# Altium PCB CYUSB.PcbDoc (part 1 of 2)
Units mm, origin at the board's own origin, x right, y up, seen from the top; angles counter-clockwise.
Board outline 36.49 x 50.37 mm, 4 copper layers (Top Layer, Internal Plane 1, Signal Layer 1, Bottom Layer), stack 0.778 mm thick; 127 components, 177 nets, 911 pads, 528 vias.
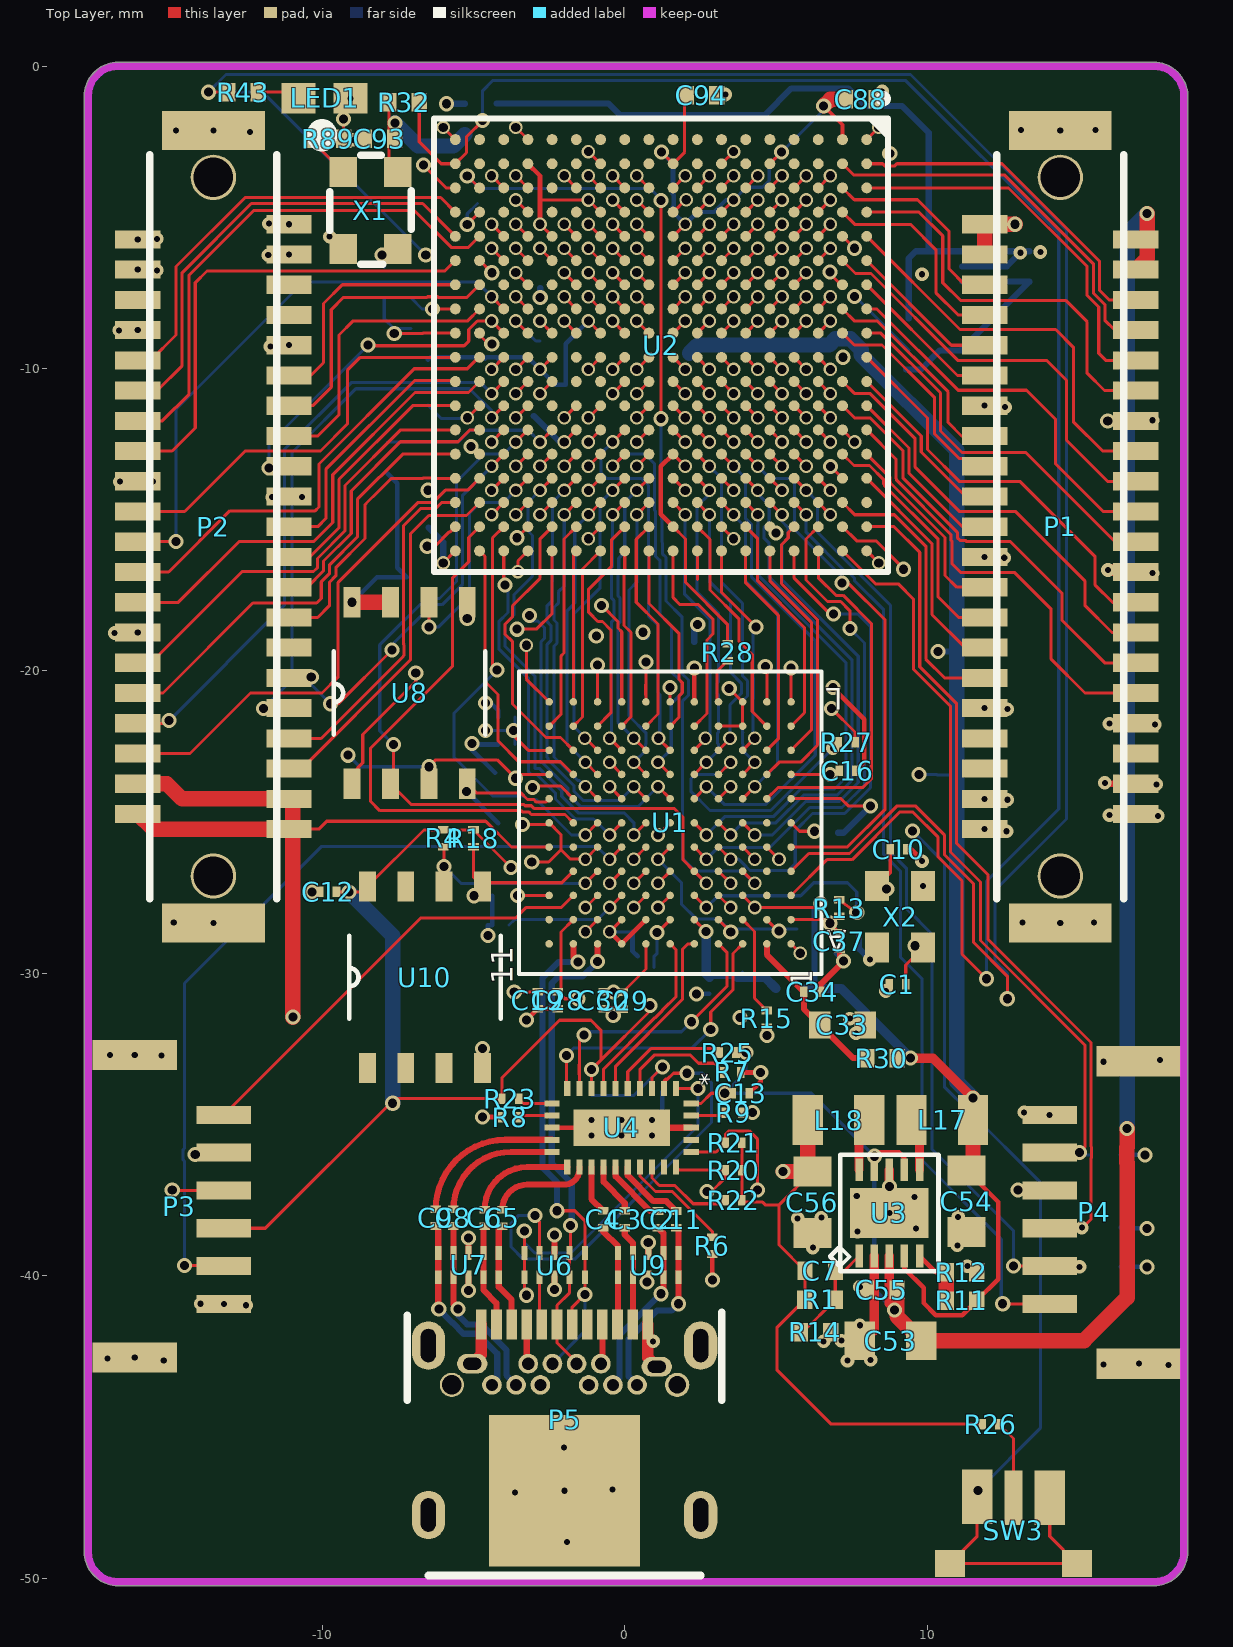
[diagram p0: Top Layer view]
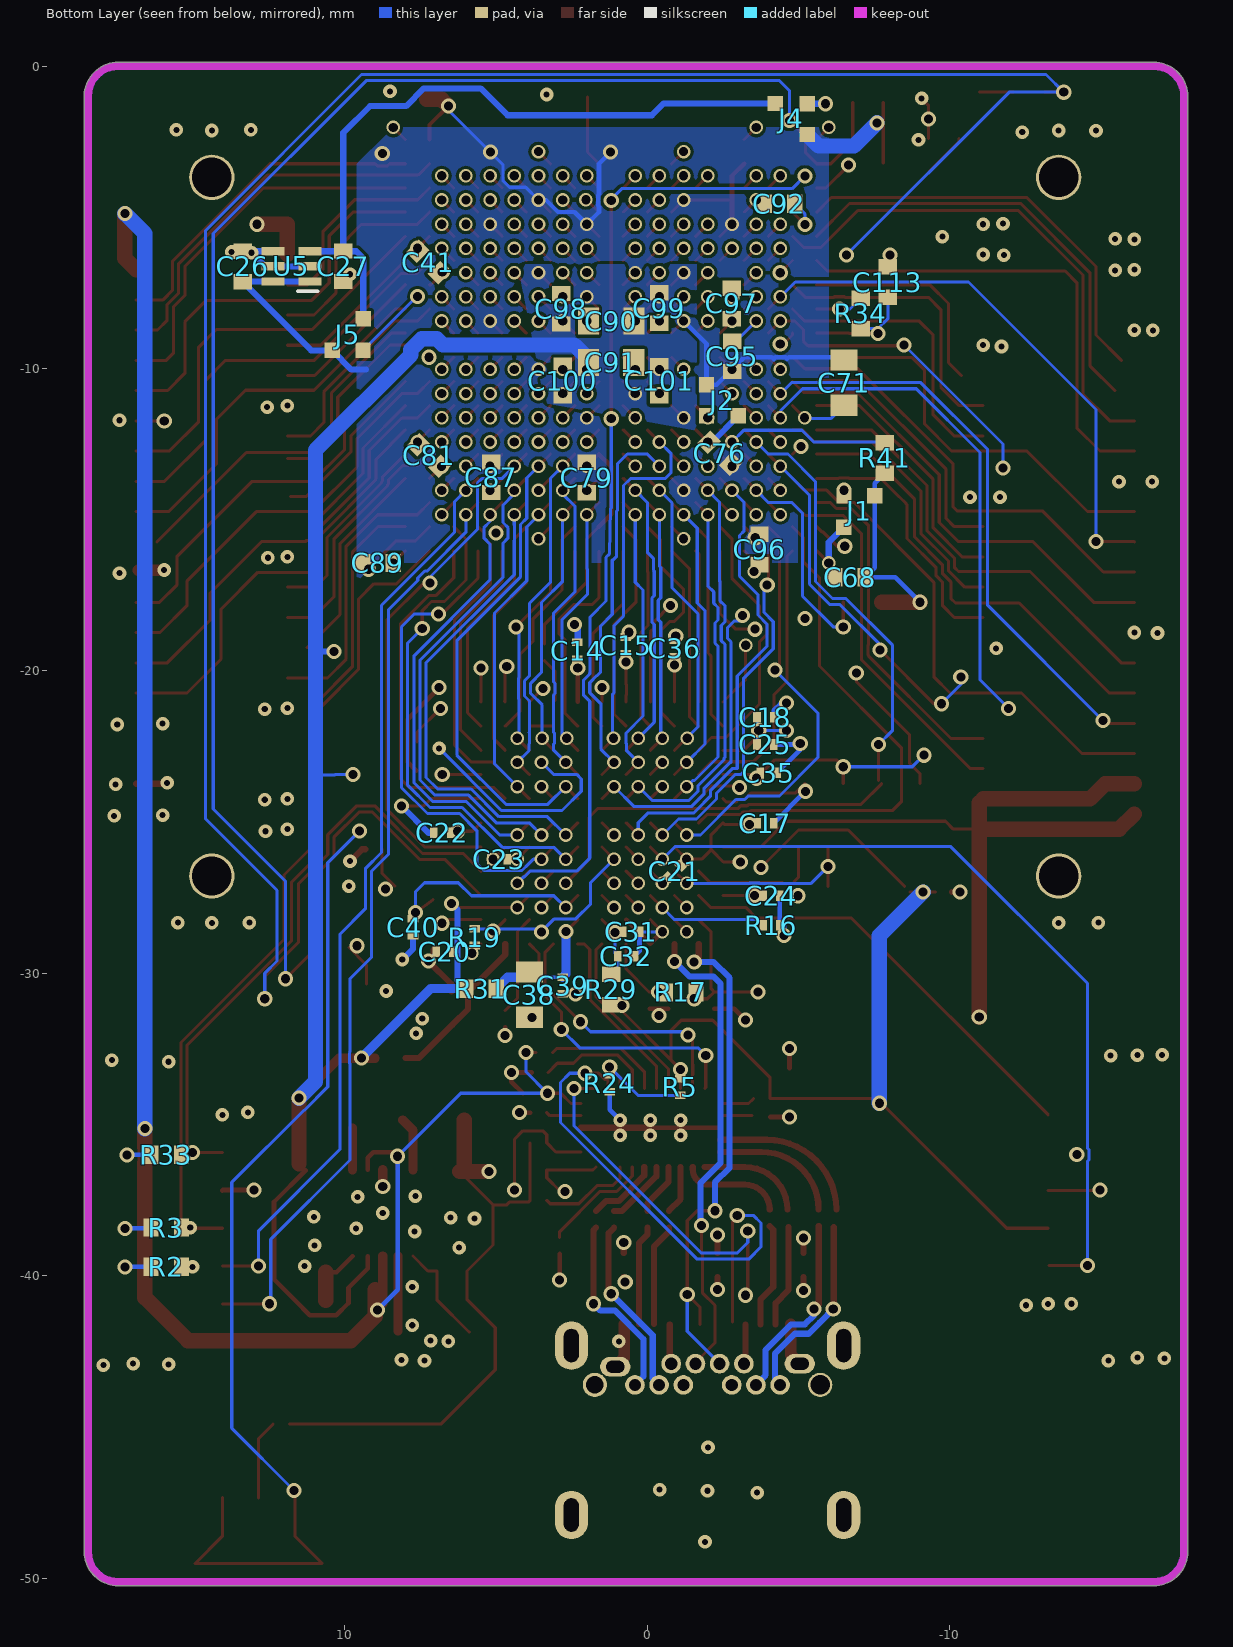
[diagram p1: Bottom Layer view, seen from below]
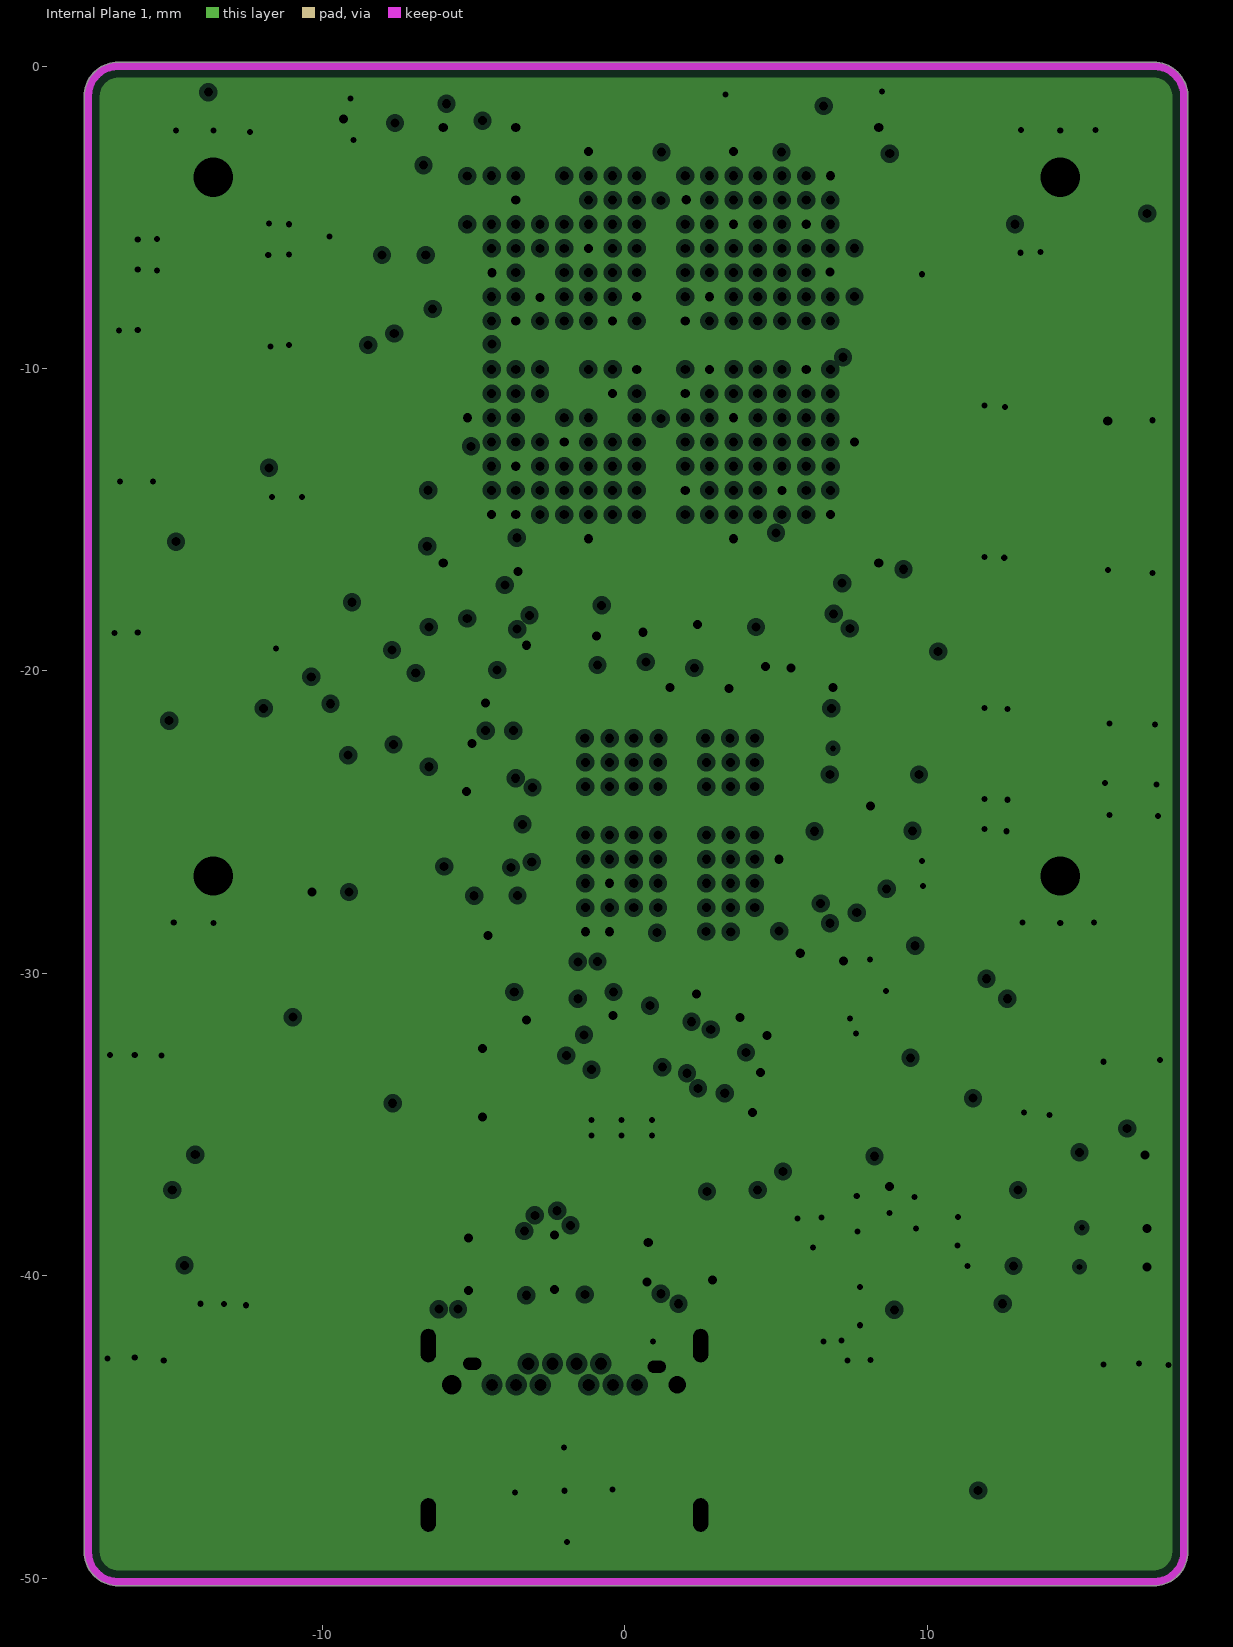
[diagram p2: Internal Plane 1, clearances drawn from the general rule]
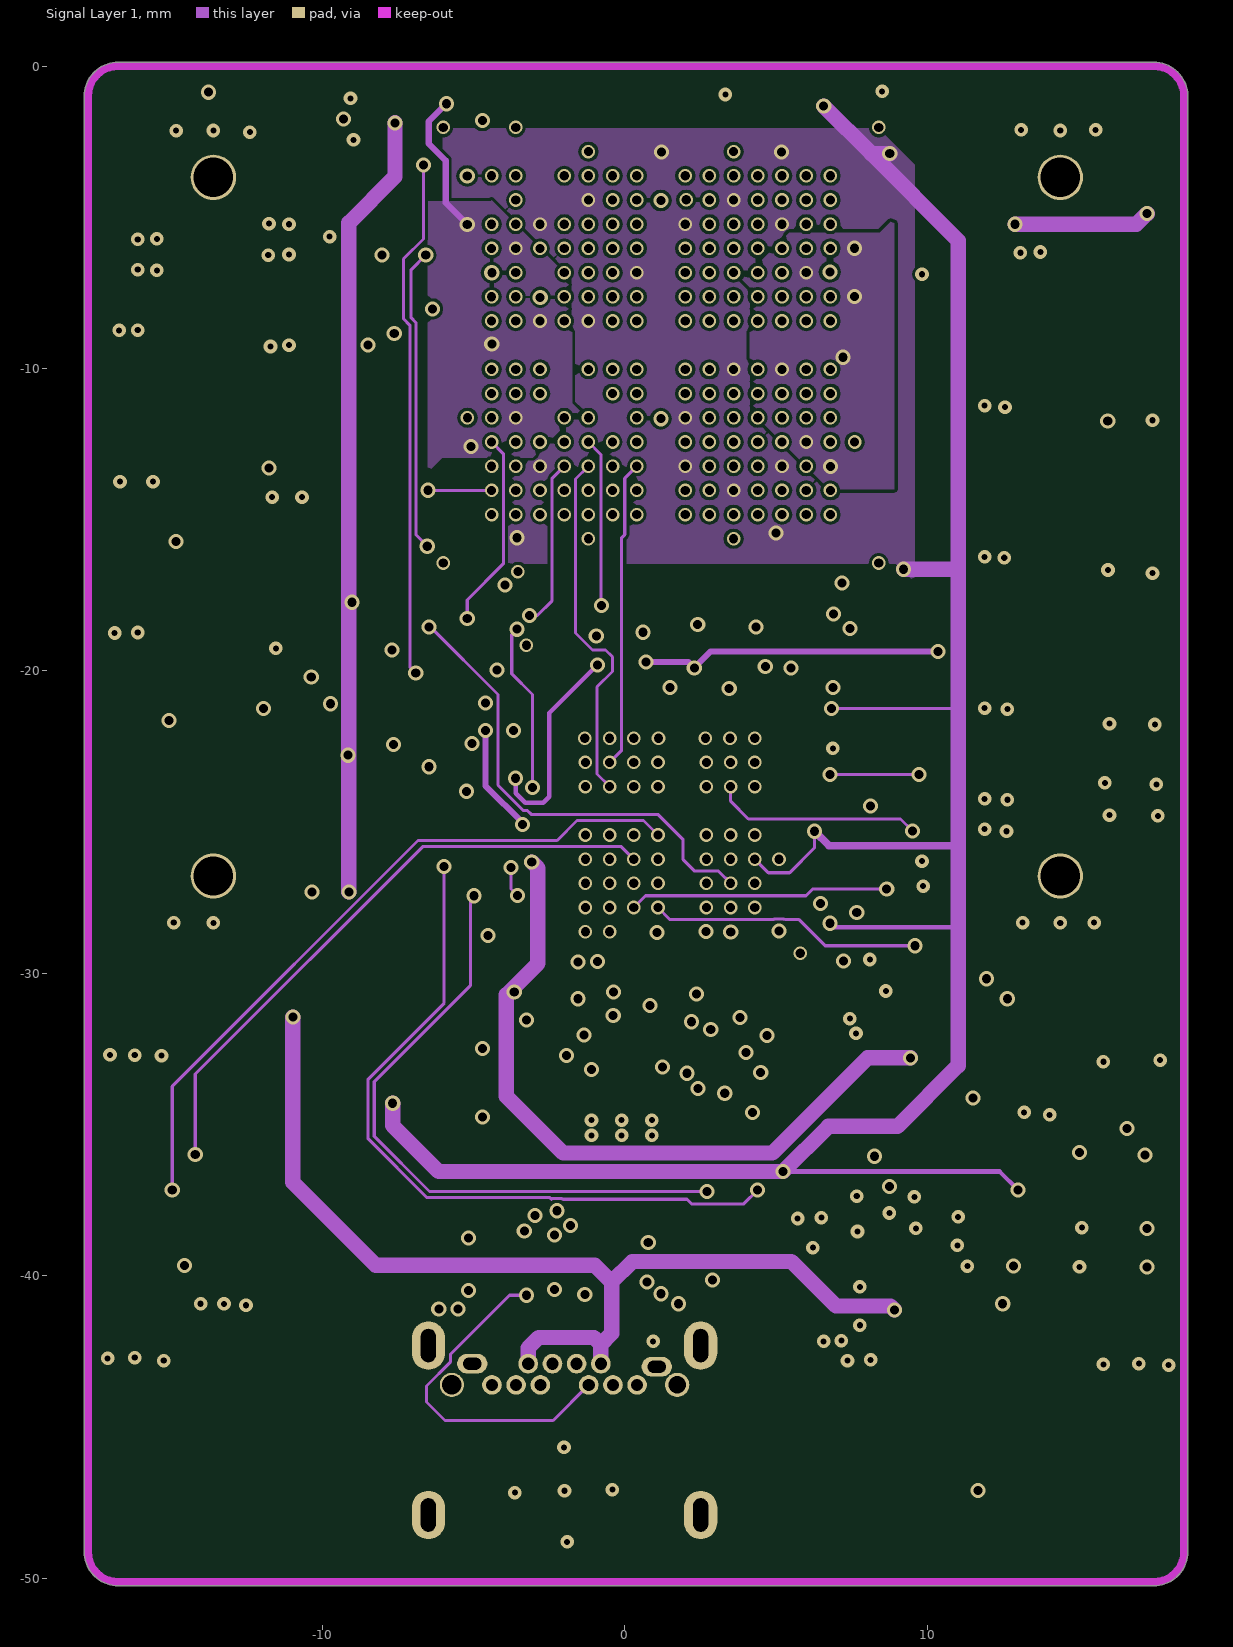
[diagram p3: Signal Layer 1]

## Layer stack, top to bottom
Top Solder: solder mask 0.0102, Solder Resist, Dk 3.8
Top Layer: signal copper 0.0356
Dielectric 1: core 0.254, Dk 4.2
Internal Plane 1: plane copper 0.036, net GND
Dielectric 3: core 0.254, Dk 4.2
Signal Layer 1: signal copper 0.036
Dielectric 4: prepreg 0.127, Dk 4.2
Bottom Layer: signal copper 0.0356
Bottom Solder: solder mask 0.0102, Solder Resist, Dk 3.8

## Board outline
-17.87,-49.117 ccw(c-16.743,-49.117) -16.743,-50.245 ccw(c-16.743,-50.117) -16.742,-50.245 17.491,-50.245 ccw(c17.491,-49.117) 18.618,-49.117 ccw(c18.491,-49.117) 18.618,-49.116 18.618,-0.917 ccw(c18.491,-0.917) 18.611,-0.876 ccw(c17.491,-1) 17.491,0.127 ccw(c17.491,0) 17.489,0.127 -16.743,0.127 ccw(c-16.743,-1) -17.87,-1 ccw(c-17.743,-1) -17.87,-1.001

## Design rules (kind name [scope] priority, off if disabled: settings)
Clearance 50R [InNetClass('50R') vs InPolygon] p1: gap=0.381 ignorepadtopadclearanceinfootprint=FALSE
Clearance [All] p2: gap=0.102 ignorepadtopadclearanceinfootprint=FALSE
DiffPairsRouting [All] p1: maxlimit=0.254 minlimit=0.254 mostfreqgap=0.254 toplayer_minwidth=0.152 toplayer_maxwidth=0.381 toplayer_prefwidth=0.381 midlayer1_minwidth=0.152 midlayer1_maxwidth=0.381 midlayer1_prefwidth=0.381 bottomlayer_minwidth=0.152 bottomlayer_maxwidth=0.381 bottomlayer_prefwidth=0.381 maxuncoupledlength=12.7
MinimumSolderMaskSliver [All] p1 off: minsoldermaskwidth=0.254
NetAntennae NetAntennae_1 [InAnyNet] p1: netantennaetolerance=0
NetAntennae [not InAnyNet] p2: netantennaetolerance=5.08
PlaneClearance [All] p1: clearance=0.152
PlaneConnect [All] p1: planeconnectstyle=Direct reliefexpansion=0.508 reliefentries=4 reliefconductorwidth=0.254 reliefairgap=0.254
PolygonConnect [All] p1: connectstyle=Direct reliefconductorwidth=0.254 reliefentries=4 polygonreliefangle="90 Angle" airgapwidth=0.254
RoomDefinition USB_TYPE_C [InComponentClass('USB_TYPE_C')] p1 off: confinementstyle=ConfineIn formatcopy=TRUE lockcomponents=FALSE outline -107.652,-127.904 -56.852,-127.904 -56.852,-102.504 -107.652,-102.504
RoomDefinition FPGA_IO_Interface [InComponentClass('FPGA_IO_Interface')] p2 off: confinementstyle=ConfineIn formatcopy=TRUE lockcomponents=FALSE outline 19.447,-9.604 41.047,-9.604 41.047,-1.504 19.447,-1.504
RoomDefinition FPGA_Configuration_power [InComponentClass('FPGA_Configuration_power')] p3 off: confinementstyle=ConfineIn formatcopy=TRUE lockcomponents=FALSE outline 19.447,-46.304 171.147,-46.304 171.147,-32.104 19.447,-32.104
RoomDefinition CYUSB_IO [InComponentClass('CYUSB_IO')] p4 off: confinementstyle=ConfineIn formatcopy=TRUE lockcomponents=FALSE outline 19.525,-40.553 35.324,-40.553 35.324,-36.007 19.525,-36.007
RoomDefinition connector [InComponentClass('connector')] p5 off: confinementstyle=ConfineIn formatcopy=TRUE lockcomponents=FALSE outline 19.5,-46.395 64.331,-46.395 64.331,-15.865 19.5,-15.865
RoomDefinition CYUSB [InComponentClass('CYUSB')] p6 off: confinementstyle=ConfineIn formatcopy=TRUE lockcomponents=FALSE outline 19.5,-46.37 25.596,-46.37 25.596,-39.791 19.5,-39.791
RoomDefinition power [InComponentClass('power')] p7 off: confinementstyle=ConfineIn formatcopy=TRUE lockcomponents=FALSE outline 8.553,-18.684 60.75,-18.684 60.75,-11.699 8.553,-11.699
RoutingVias [All] p1: holewidth=0.2 width=0.45 viastyle="Through Hole" minholewidth=0.2 minwidth=0.45 maxholewidth=0.711 maxwidth=1.27
ShortCircuit NoNet [not InAnyNet vs not InAnyNet] p1: allowed=TRUE
ShortCircuit [All] p2: allowed=FALSE
SilkToBoardRegionClearance [All] p1 off:
SilkToSilkClearance [All] p1 off: silktosilkclearance=0.254
SilkToSolderMaskClearance [IsPad] p1 off: minsilkscreentomaskgap=0.254 clearancetoexposedcopper=TRUE
SolderMaskExpansion [All] p1: expansion=0.102
Width [All] p1: maxlimit=1.524 minlimit=0.102 preferedwidth=0.102
21 further rules are at their usual default settings.

## Classes and differential pairs
net class Power: 1.2 1.8 3.3D
component class power: C7 C26 C27 C53 C54 C55 C56 L17 L18 R1 R11 R12 R14 U3 U5
component class CYUSB: C1 C10 C12 C14 C15 C16 C17 C18 C19 C20 C21 C22 C23 C24 C25 C28 C29 C30 C31 C32 C33 C34 C35 C36 C37 C38 C39 C40 P3 R4 R13 R17 R18 R19 R29 R30 R31 U10 X2
component class USB_TYPE_C: C2 C3 C4 C5 C6 C8 C9 C11 P5 R5 R6 R7 R8 R9 R20 R21 R22 R23 R24 R25 U4 U6 U7 U9
component class CYUSB_IO: C13 R15 R16 R26 R27 R28 SW3 U1
component class FPGA_Configuration_power: C41 C71 C76 C79 C81 C87 C88 C89 C90 C91 C92 C94 C95 C96 C97 C98 C99 C100 C101 J4 J5 LED1 P4 R2 R3 R32 R33 R41 R43 R?
component class FPGA_IO_Interface: C68 C93 C113 J1 J2 R34 R89 U2 U8 X1
net class DQ[0..31]: DQ0 DQ1 DQ2 DQ3 DQ4 DQ5 DQ6 DQ7 DQ8 DQ9 DQ10 DQ11 DQ12 DQ13 DQ14 DQ15 DQ16 DQ17 DQ18 DQ19 DQ20 DQ21 DQ22 DQ23 DQ24 DQ25 DQ26 DQ27 DQ28 DQ29 DQ30 DQ31
net class CTL[0..12]: CTL0 CTL1 CTL2 CTL3 CTL4 CTL5 CTL6 CTL7 CTL8 CTL9 CTL10 CTL11 CTL12
net class CYUSB: CTL0 CTL1 CTL2 CTL3 CTL4 CTL5 CTL6 CTL7 CTL8 CTL9 CTL10 CTL11 CTL12 DQ0 DQ1 DQ2 DQ3 DQ4 DQ5 DQ6 DQ7 DQ8 DQ9 DQ10 DQ11 DQ12 DQ13 DQ14 DQ15 DQ16 DQ17 DQ18 DQ19 DQ20 DQ21 DQ22 DQ23 DQ24 DQ25 DQ26 DQ27 DQ28 DQ29 DQ30 DQ31 INT_CYUSB PCLK
net class IA[0..23]: IA0 IA1 IA2 IA3 IA4 IA5 IA6 IA7 IA8 IA9 IA10 IA11 IA12 IA13 IA14 IA15 IA16 IA17 IA18 IA19 IA20 IA21 IA22 IA23
net class IB[0..23]: IB0 IB1 IB2 IB3 IB4 IB5 IB6 IB7 IB8 IB9 IB10 IB11 IB12 IB13 IB14 IB15 IB16 IB17 IB18 IB19 IB20 IB21 IB22 IB23
component class connector: P1 P2

## Components (designator, comment, footprint, x,y, rotation, side; value= is the part's Value field where it differs from the comment)
C1 "100nF" 0201 9.017,-30.353 r0 top
C2 "100nF" 0201 1.1,-38.129 r90 top
C3 "100nF" 0201 0,-38.125 r90 top
C4 "100nF" 0201 -0.711,-38.125 r90 top
C5 "100nF" 0201 -4.049,-38.085 r90 top
C6 "100nF" 0201 -4.633,-38.085 r90 top
C7 "33pF" 0402 6.471,-39.836 r180 top
C8 "100nF" 0201 -5.664,-38.075 r90 top
C9 "100nF" 0201 -6.248,-38.075 r90 top
C10 "100nF" 0201 9.053,-25.893 r0 top
C11 "100nF" 0201 1.7,-38.129 r90 top
C12 "100nF" 0201 -9.804,-27.305 r0 top
C13 "100nF" 0201 3.835,-33.96 r180 top
C14 "100nF" 0201 2.311,-19.329 r270 bottom
C15 "100nF" 0201 0.711,-19.152 r270 bottom
C16 "100nF" 0201 7.366,-23.292 r180 top
C17 "100nF" 0201 -3.9,-25.029 r0 bottom
C18 "100nF" 0201 -3.9,-21.529 r0 bottom
C19 "100nF" 0201 -2.87,-30.886 r90 top
C20 "100nF" 0201 6.706,-29.286 r180 bottom
C21 "100nF" 0201 -0.9,-26.629 r135 bottom
C22 "100nF" 0201 6.782,-25.349 r180 bottom
C23 "100nF" 0201 4.9,-26.229 r180 bottom
C24 "100nF" 0201 -4.1,-27.429 r0 bottom
C25 "10nF" 0201 -3.9,-22.429 r0 bottom
C26 "2.2uF" 0402 13.38,-6.622 r270 bottom
C27 "2.2uF" 0402 10.052,-6.622 r90 bottom
C28 "10nF" 0201 -2.21,-30.886 r90 top
C29 "2.2uF" 0201 -0.07,-30.9 r90 top
C30 "100nF" 0201 -0.686,-30.886 r90 top
C31 "10nF" 0201 0.533,-28.626 r0 bottom
C32 "100nF" 0201 0.7,-29.429 r0 bottom
C33 "22uF" 0603L 7.2,-31.7 r180 top
C34 "100nF" 0201 6.2,-30.6 r180 top
C35 "100nF" 0201 -4.013,-23.368 r0 bottom
C36 "100nF" 0201 -0.914,-19.253 r270 bottom
C37 "100nF" 0201 7.1,-28.929 r90 top
C38 "22uF" 0603L 3.9,-30.7 r90 bottom
C39 "100nF" 0201 2.8,-30.4 r90 bottom
C40 "100nF" 0201 7.747,-28.473 r90 bottom
C41 "0.1uF" 0402 7.239,-6.477 r225 bottom
C53 "10UF" 0805 8.788,-42.139 r0 top
C54 "4.7UF" 0805 11.3,-37.529 r90 top
C55 "33pF" 0402 8.493,-40.458 r0 top
C56 "4.7UF" 0805 6.207,-37.563 r90 top
C68 "0.1uF" 0402 -6.7,-16.9 r180 bottom
C71 "10uF" 0603L -6.502,-10.465 r270 bottom
C76 "0.1uF" 0402 -2.4,-12.8 r45 bottom
C79 "0.1uF" 0402 2,-13.6 r270 bottom
C81 "0.1uF" 0402 7.214,-12.878 r45 bottom
C87 "0.1uF" 0402 5.156,-13.589 r270 bottom
C88 "0.1uF" 0402 7.8,-1.1 r0 top
C89 "0.1uF" 0402 8.911,-16.429 r180 bottom
C90 "10uF" 0603L 1.194,-8.433 r0 bottom
C91 "10uF" 0603L 1.2,-9.8 r180 bottom
C92 "0.1uF" 0402 -4.369,-4.547 r0 bottom
C93 "0.1uF" 0402 -8.1,-2.4 r180 top
C94 "0.1uF" 0402 2.54,-0.965 r0 top
C95 "0.1uF" 0402 -2.8,-9.6 r90 bottom
C96 "0.1uF" 0402 -3.708,-15.977 r270 bottom
C97 "0.1uF" 0402 -2.794,-7.849 r90 bottom
C98 "0.1uF" 0402 2.845,-8.026 r90 bottom
C99 "0.1uF" 0402 -0.4,-8 r270 bottom
C100 "0.1uF" 0402 2.8,-10.4 r90 bottom
C101 "0.1uF" 0402 -0.4,-10.4 r270 bottom
C113 "0R/0.1uF" 0402 -7.95,-7.137 r270 bottom
J1 "jumper" 0402J -6.5,-14.2 r180 bottom
J2 "jumper" 0402J -1.956,-11.557 r90 bottom
J4 "jumper" 0402J -5.283,-1.245 r270 bottom
J5 "jumper" 0402J 9.4,-9.4 r0 bottom
L17 "2.2UH" 0806 10.5,-34.845 r0 top
L18 "2.2uH" 0806 7.071,-34.845 r180 top
LED1 "LED0" 0603 -9.931,-1.067 r0 top
P1 "DF9-41S" DF9-41S 14.4,-15.229 r270 top
P2 "DF9-41S" DF9-41S -13.6,-15.229 r90 top
P3 "JTAG-6P" GH1.25-6 -14.7,-37.8 r270 top
P4 "JTAG-6P" GH1.25-6 15.5,-37.8 r90 top
P5 "TYPEC" TYPEC -1.99,-43.603 r0 top
R1 "300k" 0402 6.461,-40.789 r180 top
R2 "10k" 0402 15.9,-39.7 r0 bottom
R3 "10k" 0402 15.9,-38.4 r0 bottom
R4 "4.7k" 0201 -6,-25.529 r90 top
R5 "NC" 0201 -1.092,-33.757 r90 bottom
R6 "100k" 0201 2.9,-39 r90 top
R7 "100k" 0201 3.556,-33.274 r180 top
R8 "100k" 0201 -3.785,-34.747 r0 top
R9 "100k" 0201 3.6,-34.6 r180 top
R11 "180k" 0402 11.135,-40.814 r0 top
R12 "180k" 0402 11.135,-39.874 r0 top
R13 "10k" 0201 7.087,-27.838 r270 top
R14 "68k" 0402 6.299,-41.859 r0 top
R15 "200R 1%" 0201 4.7,-31.5 r270 top
R16 "6.04K 1%" 0201 -4.1,-28.4 r180 bottom
R17 "FB" 0402 -1.1,-30.629 r180 bottom
R18 "10k" 0201 -5,-25.529 r90 top
R19 "10k" 0201 5.7,-28.8 r270 bottom
R20 "100k" 0201 3.6,-36.5 r0 top
R21 "100k" 0201 3.6,-35.6 r0 top
R22 "100k" 0201 3.6,-37.5 r0 top
R23 "100k" 0201 -3.785,-34.138 r0 top
R24 "0R" 0201 1.245,-33.63 r90 bottom
R25 "900k" 0201 3.404,-32.614 r0 top
R26 "10k" 0201 12.1,-44.9 r0 top
R27 "10k" 0201 7.341,-22.352 r180 top
R28 "NC" 0201 3.404,-19.38 r270 top
R29 "FB" 0402 1.194,-30.531 r90 bottom
R30 "FB" 0402 8.5,-32.8 r0 top
R31 "FB" 0402 5.5,-30.5 r0 bottom
R32 "10k" 0402 -7.3,-1.2 r0 top
R33 "10k" 0402 15.9,-36 r0 bottom
R34 "470k" 0402 -7.061,-8.179 r90 bottom value=0Ohm
R41 "NC" 0402 -7.849,-12.954 r270 bottom
R43 "10k" 0402 -12.624,-0.864 r0 top
R89 "0R" 0402 -9.8,-2.4 r0 top value=0Ohm
SW3 "SW-PB" SW-SIDE 12.851,-48.708 r0 top
U1 "FX3_121_BUMP" FX3_121_BUMP 1.501,-25.021 r180 top
U2 "XC6SLX45-3CSG324I" CSG324 1.2,-9.229 r270 top
U3 "Tps62410" DFN-10P-3X3 8.747,-37.893 r90 top
U4 "HD3SS3220" HD3SS3220 -0.1,-35.1 r270 top
U5 "TLV700xx-WSON" WSON 11.779,-6.622 r0 bottom
U6 "PUSB3FR4" PUSB3FR4 -2.32,-39.64 r270 top
U7 "PUSB3FR4" PUSB3FR4 -5.165,-39.64 r270 top
U8 "M25P16" SO8 -7.112,-20.726 r90 top
U9 "PUSB3FR4" PUSB3FR4 0.779,-39.64 r270 top
U10 "M24M02" SO8 -6.604,-30.124 r90 top
X1 "OSC_40M" TXC_7Q -8.407,-4.775 r270 top
X2 "24mhz" OSCILLATOR-2.5x2.0 9.104,-28.128 r270 top

## Footprints (in the part's own frame and the unit in brackets; to place one, negate y for a bottom-side part, rotate by r counter-clockwise, add the part's x,y. Pads: shape width x height; smd on the part's side, far side on the other; paste and mask are expansions set on the pad)
0201 [mm]
  rect 0.25x0.35 smd: 1(-0.275,0) 2(0.275,0)
0402 [mil] "0402-RES"
  rect 20x24 smd: 1(-19.68,0) 2(20,0)
0402J [mil] "0402-RES"
  rect 20x20 smd: 1(40,0) 2(0,0) 3(-0.35,-41.34)
0603 [mil] "0603-RES"
  rect 44x40 smd: 1(-33.46,0) 2(34,0)
0603L [mm]
  rect 0.7x0.9 smd: 1(-0.75,0) 2(0.75,0)
  body extent -0.8,-0.4 0.8,0.4, height 0.8
0805 [mm]
  rect 1x1.27 smd: 1(-1.016,0) 2(1.016,0)
  body extent -1.27,-0.76 1.27,0.76, height 0.8
0806 [mm]
  rect 1x1.65 smd: 1(-1.016,0) 2(1.016,0)
  body extent -1,-0.8 1,0.8, height 0.5
CSG324 [mm] "BGA, 324-Leads, Body 15x15mm, Pitch 0.8mm"
  round 0.36 smd: A1(-6.8,6.8) A2(-6,6.8) A3(-5.2,6.8) A4(-4.4,6.8) A5(-3.6,6.8) A6(-2.8,6.8) A7(-2,6.8) A8(-1.2,6.8) A9(-0.4,6.8) A10(0.4,6.8) A11(1.2,6.8) A12(2,6.8) A13(2.8,6.8) A14(3.6,6.8) A15(4.4,6.8) A16(5.2,6.8) A17(6,6.8) A18(6.8,6.8) B1(-6.8,6) B2(-6,6) B3(-5.2,6) B4(-4.4,6) B5(-3.6,6) B6(-2.8,6) B7(-2,6) B8(-1.2,6) B9(-0.4,6) B10(0.4,6) B11(1.2,6) B12(2,6) B13(2.8,6) B14(3.6,6) B15(4.4,6) B16(5.2,6) B17(6,6) B18(6.8,6) C1(-6.8,5.2) C2(-6,5.2) C3(-5.2,5.2) C4(-4.4,5.2) C5(-3.6,5.2) C6(-2.8,5.2) C7(-2,5.2) C8(-1.2,5.2) C9(-0.4,5.2) C10(0.4,5.2) C11(1.2,5.2) C12(2,5.2) C13(2.8,5.2) C14(3.6,5.2) C15(4.4,5.2) C16(5.2,5.2) C17(6,5.2) C18(6.8,5.2) D1(-6.8,4.4) D2(-6,4.4) D3(-5.2,4.4) D4(-4.4,4.4) D5(-3.6,4.4) D6(-2.8,4.4) D7(-2,4.4) D8(-1.2,4.4) D9(-0.4,4.4) D10(0.4,4.4) D11(1.2,4.4) D12(2,4.4) D13(2.8,4.4) D14(3.6,4.4) D15(4.4,4.4) D16(5.2,4.4) D17(6,4.4) D18(6.8,4.4) E1(-6.8,3.6) E2(-6,3.6) E3(-5.2,3.6) E4(-4.4,3.6) E5(-3.6,3.6) E6(-2.8,3.6) E7(-2,3.6) E8(-1.2,3.6) E9(-0.4,3.6) E10(0.4,3.6) E11(1.2,3.6) E12(2,3.6) E13(2.8,3.6) E14(3.6,3.6) E15(4.4,3.6) E16(5.2,3.6) E17(6,3.6) E18(6.8,3.6) F1(-6.8,2.8) F2(-6,2.8) F3(-5.2,2.8) F4(-4.4,2.8) F5(-3.6,2.8) F6(-2.8,2.8) F7(-2,2.8) F8(-1.2,2.8) F9(-0.4,2.8) F10(0.4,2.8) F11(1.2,2.8) F12(2,2.8) F13(2.8,2.8) F14(3.6,2.8) F15(4.4,2.8) F16(5.2,2.8) F17(6,2.8) F18(6.8,2.8) G1(-6.8,2) G2(-6,2) G3(-5.2,2) G4(-4.4,2) G5(-3.6,2) G6(-2.8,2) G7(-2,2) G8(-1.2,2) G9(-0.4,2) G10(0.4,2) G11(1.2,2) G12(2,2) G13(2.8,2) G14(3.6,2) G15(4.4,2) G16(5.2,2) G17(6,2) G18(6.8,2) H1(-6.8,1.2) H2(-6,1.2) H3(-5.2,1.2) H4(-4.4,1.2) H5(-3.6,1.2) H6(-2.8,1.2) H7(-2,1.2) H8(-1.2,1.2) H9(-0.4,1.2) H10(0.4,1.2) H11(1.2,1.2) H12(2,1.2) H13(2.8,1.2) H14(3.6,1.2) H15(4.4,1.2) H16(5.2,1.2) H17(6,1.2) H18(6.8,1.2) J1(-6.8,0.4) J2(-6,0.4) J3(-5.2,0.4) J4(-4.4,0.4) J5(-3.6,0.4) J6(-2.8,0.4) J7(-2,0.4) J8(-1.2,0.4) J9(-0.4,0.4) J10(0.4,0.4) J11(1.2,0.4) J12(2,0.4) J13(2.8,0.4) J14(3.6,0.4) J15(4.4,0.4) J16(5.2,0.4) J17(6,0.4) J18(6.8,0.4) K1(-6.8,-0.4) K2(-6,-0.4) K3(-5.2,-0.4) K4(-4.4,-0.4) K5(-3.6,-0.4) K6(-2.8,-0.4) K7(-2,-0.4) K8(-1.2,-0.4) K9(-0.4,-0.4) K10(0.4,-0.4) K11(1.2,-0.4) K12(2,-0.4) K13(2.8,-0.4) K14(3.6,-0.4) K15(4.4,-0.4) K16(5.2,-0.4) K17(6,-0.4) K18(6.8,-0.4) L1(-6.8,-1.2) L2(-6,-1.2) L3(-5.2,-1.2) L4(-4.4,-1.2) L5(-3.6,-1.2) L6(-2.8,-1.2) L7(-2,-1.2) L8(-1.2,-1.2) L9(-0.4,-1.2) L10(0.4,-1.2) L11(1.2,-1.2) L12(2,-1.2) L13(2.8,-1.2) L14(3.6,-1.2) L15(4.4,-1.2) L16(5.2,-1.2) L17(6,-1.2) L18(6.8,-1.2) M1(-6.8,-2) M2(-6,-2) M3(-5.2,-2) M4(-4.4,-2) M5(-3.6,-2) M6(-2.8,-2) M7(-2,-2) M8(-1.2,-2) M9(-0.4,-2) M10(0.4,-2) M11(1.2,-2) M12(2,-2) M13(2.8,-2) M14(3.6,-2) M15(4.4,-2) M16(5.2,-2) M17(6,-2) M18(6.8,-2) N1(-6.8,-2.8) N2(-6,-2.8) N3(-5.2,-2.8) N4(-4.4,-2.8) N5(-3.6,-2.8) N6(-2.8,-2.8) N7(-2,-2.8) N8(-1.2,-2.8) N9(-0.4,-2.8) N10(0.4,-2.8) N11(1.2,-2.8) N12(2,-2.8) N13(2.8,-2.8) N14(3.6,-2.8) N15(4.4,-2.8) N16(5.2,-2.8) N17(6,-2.8) N18(6.8,-2.8) P1(-6.8,-3.6) P2(-6,-3.6) P3(-5.2,-3.6) P4(-4.4,-3.6) P5(-3.6,-3.6) P6(-2.8,-3.6) P7(-2,-3.6) P8(-1.2,-3.6) P9(-0.4,-3.6) P10(0.4,-3.6) P11(1.2,-3.6) P12(2,-3.6) P13(2.8,-3.6) P14(3.6,-3.6) P15(4.4,-3.6) P16(5.2,-3.6) P17(6,-3.6) P18(6.8,-3.6) R1(-6.8,-4.4) R2(-6,-4.4) R3(-5.2,-4.4) R4(-4.4,-4.4) R5(-3.6,-4.4) R6(-2.8,-4.4) R7(-2,-4.4) R8(-1.2,-4.4) R9(-0.4,-4.4) R10(0.4,-4.4) R11(1.2,-4.4) R12(2,-4.4) R13(2.8,-4.4) R14(3.6,-4.4) R15(4.4,-4.4) R16(5.2,-4.4) R17(6,-4.4) R18(6.8,-4.4) T1(-6.8,-5.2) T2(-6,-5.2) T3(-5.2,-5.2) T4(-4.4,-5.2) T5(-3.6,-5.2) T6(-2.8,-5.2) T7(-2,-5.2) T8(-1.2,-5.2) T9(-0.4,-5.2) T10(0.4,-5.2) T11(1.2,-5.2) T12(2,-5.2) T13(2.8,-5.2) T14(3.6,-5.2) T15(4.4,-5.2) T16(5.2,-5.2) T17(6,-5.2) T18(6.8,-5.2) U1(-6.8,-6) U2(-6,-6) U3(-5.2,-6) U4(-4.4,-6) U5(-3.6,-6) U6(-2.8,-6) U7(-2,-6) U8(-1.2,-6) U9(-0.4,-6) U10(0.4,-6) U11(1.2,-6) U12(2,-6) U13(2.8,-6) U14(3.6,-6) U15(4.4,-6) U16(5.2,-6) U17(6,-6) U18(6.8,-6) V1(-6.8,-6.8) V2(-6,-6.8) V3(-5.2,-6.8) V4(-4.4,-6.8) V5(-3.6,-6.8) V6(-2.8,-6.8) V7(-2,-6.8) V8(-1.2,-6.8) V9(-0.4,-6.8) V10(0.4,-6.8) V11(1.2,-6.8) V12(2,-6.8) V13(2.8,-6.8) V14(3.6,-6.8) V15(4.4,-6.8) V16(5.2,-6.8) V17(6,-6.8) V18(6.8,-6.8)
  silkscreen extent -8.27,-7.5 7.5,7.5, body extent -7.5,-7.5 7.5,7.5, height 1.5
DF9-41S [mm]
  rect 1.3x3.4 smd: 0(-13.1,0) 0(13.1,0)
  round 1.5 hole 1.3: 0(-11.55,0) 0(11.55,0)
  rect 0.6x1.5 smd: 1(-10,-2.5) 2(-9,-2.5) 3(-8,-2.5) 4(-7,-2.5) 5(-6,-2.5) 6(-5,-2.5) 7(-4,-2.5) 8(-3,-2.5) 9(-2,-2.5) 10(-1,-2.5) 11(0,-2.5) 12(1,-2.5) 13(2,-2.5) 14(3,-2.5) 15(4,-2.5) 16(5,-2.5) 17(6,-2.5) 18(7,-2.5) 19(8,-2.5) 20(9,-2.5) 21(10,-2.5) 22(9.5,2.5) 23(8.5,2.5) 24(7.5,2.5) 25(6.5,2.5) 26(5.5,2.5) 27(4.5,2.5) 28(3.5,2.5) 29(2.5,2.5) 30(1.5,2.5) 31(0.5,2.5) 32(-0.5,2.5) 33(-1.5,2.5) 34(-2.5,2.5) 35(-3.5,2.5) 36(-4.5,2.5) 37(-5.5,2.5) 38(-6.5,2.5) 39(-7.5,2.5) 40(-8.5,2.5) 41(-9.5,2.5)
  silkscreen extent -12.3,-2.1 12.3,2.1
DFN-10P-3X3 [mm]
  rect 0.75x0.25 smd mask+0.064: 1(-1.451,0.999) 2(-1.451,0.499) 3(-1.451,-0.001) 4(-1.451,-0.501) 5(-1.451,-1.001) 6(1.4,-1.001) 7(1.4,-0.501) 8(1.4,-0.001) 9(1.4,0.499) 10(1.4,0.999)
  rect 1.64x2.6 smd: 11(-0.025,-0.001)
  silkscreen extent -1.96,-1.63 1.9,1.95
FX3_121_BUMP [mm] "FX3_121_BUMP"
  round 0.25 smd: A1(-3.999,3.999) A2(-3.199,3.999) A3(-2.4,3.999) A4(-1.6,3.999) A5(-0.8,3.999) A6(0,3.999) A7(0.8,3.999) A8(1.6,3.999) A9(2.4,3.999) A10(3.199,3.999) A11(3.999,3.999) B1(-3.999,3.199) B2(-3.199,3.199) B3(-2.4,3.199) B4(-1.6,3.199) B5(-0.8,3.199) B6(0,3.199) B7(0.8,3.199) B8(1.6,3.199) B9(2.4,3.199) B10(3.199,3.199) B11(3.999,3.199) C1(-3.999,2.4) C2(-3.199,2.4) C3(-2.4,2.4) C4(-1.6,2.4) C5(-0.8,2.4) C6(0,2.4) C7(0.8,2.4) C8(1.6,2.4) C9(2.4,2.4) C10(3.199,2.4) C11(3.999,2.4) D1(-3.999,1.6) D2(-3.199,1.6) D3(-2.4,1.6) D4(-1.6,1.6) D5(-0.8,1.6) D6(0,1.6) D7(0.8,1.6) D8(1.6,1.6) D9(2.4,1.6) D10(3.199,1.6) D11(3.999,1.6) E1(-3.999,0.8) E2(-3.199,0.8) E3(-2.4,0.8) E4(-1.6,0.8) E5(-0.8,0.8) E6(0,0.8) E7(0.8,0.8) E8(1.6,0.8) E9(2.4,0.8) E10(3.199,0.8) E11(3.999,0.8) F1(-3.999,0) F2(-3.199,0) F3(-2.4,0) F4(-1.6,0) F5(-0.8,0) F6(0,0) F7(0.8,0) F8(1.6,0) F9(2.4,0) F10(3.199,0) F11(3.999,0) G1(-3.999,-0.8) G2(-3.199,-0.8) G3(-2.4,-0.8) G4(-1.6,-0.8) G5(-0.8,-0.8) G6(0,-0.8) G7(0.8,-0.8) G8(1.6,-0.8) G9(2.4,-0.8) G10(3.199,-0.8) G11(3.999,-0.8) H1(-3.999,-1.6) H2(-3.199,-1.6) H3(-2.4,-1.6) H4(-1.6,-1.6) H5(-0.8,-1.6) H6(0,-1.6) H7(0.8,-1.6) H8(1.6,-1.6) H9(2.4,-1.6) H10(3.199,-1.6) H11(3.999,-1.6) J1(-3.999,-2.4) J2(-3.199,-2.4) J3(-2.4,-2.4) J4(-1.6,-2.4) J5(-0.8,-2.4) J6(0,-2.4) J7(0.8,-2.4) J8(1.6,-2.4) J9(2.4,-2.4) J10(3.199,-2.4) J11(3.999,-2.4) K1(-3.999,-3.199) K2(-3.199,-3.199) K3(-2.4,-3.199) K4(-1.6,-3.199) K5(-0.8,-3.199) K6(0,-3.199) K7(0.8,-3.199) K8(1.6,-3.199) K9(2.4,-3.199) K10(3.199,-3.199) K11(3.999,-3.199) L1(-3.999,-3.999) L2(-3.199,-3.999) L3(-2.4,-3.999) L4(-1.6,-3.999) L5(-0.8,-3.999) L6(0,-3.999) L7(0.8,-3.999) L8(1.6,-3.999) L9(2.4,-3.999) L10(3.199,-3.999) L11(3.999,-3.999)
  silkscreen extent -5,-5 5,5, body extent -4.95,-4.95 4.95,4.95, height 0.8
GH1.25-6 [mm]
  rect 1x2.8 smd: 0(-5.1,-1.5) 0(4.9,-1.5)
  rect 0.6x1.8 smd: 1(-3.125,1.45) 2(-1.875,1.45) 3(-0.625,1.45) 4(0.625,1.45) 5(1.875,1.45) 6(3.125,1.45)
  body extent -5.48,-3.1 5.27,1.75, height 4.25
HD3SS3220 [mm]
  rect 1.2x3.2 smd: 0(0,0)
  rect 0.5x0.2 smd: 1(-1.3,1.8) 2(-1.3,1.4) 3(-1.3,1) 4(-1.3,0.6) 5(-1.3,0.2) 6(-1.3,-0.2) 7(-1.3,-0.6) 8(-1.3,-1) 9(-1.3,-1.4) 10(-1.3,-1.8) 16(1.3,-1.8) 17(1.3,-1.4) 18(1.3,-1) 19(1.3,-0.6) 20(1.3,-0.2) 21(1.3,0.2) 22(1.3,0.6) 23(1.3,1) 24(1.3,1.4) 25(1.3,1.8)
  rect 0.2x0.5 smd: 11(-0.8,-2.3) 12(-0.4,-2.3) 13(0,-2.3) 14(0.4,-2.3) 15(0.8,-2.3) 26(0.8,2.3) 27(0.4,2.3) 28(0,2.3) 29(-0.4,2.3) 30(-0.8,2.3)
  body extent -1.25,-2.25 1.25,2.25, height 0.8
OSCILLATOR-2.5x2.0 [mm] "OSCILLATOR-3.2X2.5"
  rect 1x0.8 smd: 1(-1.016,-0.762) 2(1.016,-0.762) 3(1.016,0.762) 4(-1.016,0.762)
  body extent -1.27,-1.02 1.27,1.02, height 0.9
PUSB3FR4 [mm]
  rect 0.45x0.2 smd: 1(-0.4,1) 1(0.4,1) 2(-0.4,0.5) 2(0.4,0.5) 3(-0.4,0) 4(-0.4,-0.5) 4(0.4,-0.5) 5(-0.4,-1) 5(0.4,-1) 8(0.4,0)
  body extent -0.5,-1.25 0.5,1.25, height 0.5
SO8 [mm]
  rect 1x0.559 smd: 1(-3,1.905) 2(-3,0.635) 3(-3,-0.635) 4(-3,-1.905) 5(3,-1.905) 6(3,-0.635) 7(3,0.635) 8(3,1.905)
  silkscreen extent -1.37,-2.5 1.37,2.5, body extent -3,-2.45 3,2.45, height 1.63
SW-SIDE [mm]
  rect 1x0.9 smd: 1(-2.1,-0.8) 1(2.1,-0.8)
  rect 1x1.8 smd: 1(-1.2,1.4) 1(1.2,1.375)
  rect 0.6x1.8 smd: 2(0,1.375)
  body extent -2.25,-1.83 2.25,1.27, height 3.3
TXC_7Q [mm]
  rect 1x0.9 smd: 1(-1.275,-0.9) 2(1.275,-0.9) 3(1.275,0.9) 4(-1.275,0.9)
  silkscreen extent -2.53,-1.6 1.78,1.35
TYPEC [mm]
  oval 1.1x1.6 hole 0.5 slot 1.1 at 90 deg: 0(-4.5,-4.3) 0(-4.5,1.3) 0(4.5,-4.3) 0(4.5,1.3)
  round 0.8 hole 0.65: 0(-3.725,0)
  rect 5x5 smd: 0(0,-3.5)
  round 0.8 hole 0.58: 0(3.725,0)
  rect 0.35x1 smd: 1(-2.75,2) 2(-2.25,2) 3(-1.75,2) 4(-1.25,2) 5(-0.75,2) 6(-0.25,2) 7(0.25,2) 8(0.75,2) 9(1.25,2) 10(1.75,2) 11(2.25,2) 12(2.75,2)
  oval 1x0.65 hole 0.4 slot 0.6 at 0 deg: B1(3.05,0.6) B12(-3.05,0.7)
  round 0.65 hole 0.4: B2(2.4,0) B3(1.6,0) B4(1.2,0.7) B5(0.8,0) B6(0.4,0.7) B7(-0.4,0.7) B8(-0.8,0) B9(-1.2,0.7) B10(-1.6,0) B11(-2.4,0)
  silkscreen extent -5.2,-6.3 5.2,2.4
WSON [mm]
  rect 0.75x0.28 smd: 1(-0.625,0.5) 2(-0.625,0) 3(-0.625,-0.5) 4(0.6,-0.5) 5(0.6,0) 6(0.6,0.5)
  silkscreen extent -0.88,0.82 -0.22,0.82, body extent -0.75,-0.75 0.75,0.75, height 0.7

## Part data
C1 C2 C3 C4 C5 C6 C7 C8 C9 C10 C11 C12 C13 C14 C15 C16 C17 C18 C19 C20 C21 C22 C23 C24 C25 C28 C29 C30 C31 C32 C33 C34 C35 C36 C37 C38 C39 C40 C53 C54 C55 C56: library part CAP/0402, 1st Part Field=0402
C26 C27 C68 C93 C113: library part CAP0402-CAP, "<b>Capacitor</b> / Standard 0603 ceramic capacitor, and 0.1\" leaded capacitor.", PARTNO=CC0402ZRY5V7BB104
C41 C71 C76 C79 C81 C87 C88 C89 C90 C91 C92 C94 C95 C96 C97 C98 C99 C100 C101: library part Cap, "Capacitor", LatestRevisionDate=17-Jul-2002, LatestRevisionNote="Re-released for DXP Platform.", PackageDescription="Radial Cap, Thru-Hole; 2 Leads; 0.3 in Pin Spacing", PackageReference=RAD-0.3, Published=8-Jun-2000, Publisher="Altium Limited"
J1 J2 J4 J5: library part SW-SPDT, "SPDT Subminiature Toggle Switch, Right Angle Mounting, Vertical Actuation", ComponentLink1Description="Manufacturer Link", ComponentLink1URL=http://www.apem.com, DatasheetVersion=05-Dec-2000, LatestRevisionDate=17-Dec-2003, LatestRevisionNote="Schematic revised, PCB Footprint replaced.", PackageDescription="Switch; 4 Leads", PackageReference=TL36WW15050, Published=24-Mar-1999, Publisher="Altium Limited"
L17 L18: library part L/2.5*2.0
LED1: "Typical INFRARED GaAs LED", LatestRevisionDate=08-Jul-2005, LatestRevisionNote="Mech Layer 1 removed.", PackageDescription="LED; 2 Leads", PackageReference=LED-0, Published=8-Jun-2000, Publisher="Altium Limited"
R1 R11 R12 R14: library part RES/0402_3
R2 R3 R4 R5 R6 R7 R8 R9 R13 R15 R16 R17 R18 R19 R20 R21 R22 R23 R24 R25 R26 R27 R28 R29 R30 R31 R32 R33 R34 R41 R43 R89: library part Res2, "Resistor", LatestRevisionDate=17-Jul-2002, LatestRevisionNote="Re-released for DXP Platform.", PackageDescription="Axial Device, Thru-Hole; 2 Leads; 0.4 in Pin Spacing", PackageReference=AXIAL-0.4, Published=8-Jun-2000, Publisher="Altium Limited"
SW3: "Switch", LatestRevisionDate=17-Jul-2002, LatestRevisionNote="Re-released for DXP Platform.", PackageDescription="Switch; 2 Leads", PackageReference=SPST-2, Published=24-Mar-1999, Publisher="Altium Limited"
U1: library part FX3_121_BUMP_10, "FX3", Manufacturer=Cypress
U2: "Spartan-6 LX 1.2V FPGA, 218 User I/Os, 324-Ball Chip-Scale BGA (0.8mm Pitch), Speed Grade 3, Industrial Grade, Pb-Free", Supplier Part Number 1=XC6SLX45-3CSG324I-ND, Code_JEDEC=MO-275-KKAC-1, ComponentLink1Description="Manufacturer Link", ComponentLink1URL=http://www.xilinx.com, ComponentLink2Description="Spartan-6 Datasheet", ComponentLink2URL=http://www.xilinx.com/support/documentation/data_sheets/ds160.pdf, ComponentLink3Description="Spartan-6 Documents", ComponentLink3URL=http://www.xilinx.com/support/documentation/spartan-6.htm, ComponentLink4Description="Xilinx.com Home", ComponentLink4URL=http://www.xilinx.com, DatasheetVersion="ver1.6, Nov-2010", PackageDescription="324-Ball Chip-Scale BGA (CSG324) Package, 0.8 mm Pitch", PackageReference=CSG324, PackageVersion="ver1.1, Nov-2009", Published=17-Nov-2009, Publisher="Altium Limited", Supplier 1=Digi-Key
X2: library part OSCILLATOR-3.2X2.5, "Crystal Oscillator in 3.2x2.5 SMD"

## Via types
v1: diameter 0.45, hole 0.305, Top Layer to Bottom Layer, 248 vias
v2: diameter 0.5, hole 0.3, Top Layer to Bottom Layer, 169 vias
v3: diameter 0.45, hole 0.2, Top Layer to Bottom Layer, 111 vias

## Nets (pads, with @x,y where several pads share a name; then routed paths per layer and width w, separated by ;. In a path a pad name is that pad's centre, name@x,y a point inside that pad or via, vN(x,y) a via of type N, cw(c..) or ccw(c..) an arc to the next point about the centre after c; other vN are vias at no path point)
1.2: C14.2 C15.2 C16.2 C17.2 C18.2 C19.2 C20.2 C21.2 C25.2 C28.2 C54.2 C90.1 C91.1 C98.1 C99.1 C100.1 C101.1 L17.2 R11.2 R17.2 R30.2 R31.2 U1.B10 U1.C3 U1.E9 U1.F11 U1.H1 U1.J11 U1.L5 U1.L7 U2.G7 U2.H9 U2.H11 U2.J8 U2.J10 U2.K9 U2.K11 U2.L8 U2.L10 U2.M7 U2.M12 U3.4 | length 121.8
  Top Layer w0.102: v2(-3.683,-21.971) -3.683,-22.123 -3.185,-22.622 U1.J11@-2.498,-22.622 ; v2(-3.653,-30.611) C19.2@-2.87,-30.611 C28.2@-2.21,-30.611 ; v2(-3.378,-25.07) -2.547,-25.07 U1.F11@-2.498,-25.021 -2.108,-25.412 -2.108,-25.908 ; v2(-3.073,-26.314) -2.515,-26.314 -2.108,-25.908 ; U1.B10@-1.699,-28.221 -2.108,-28.63 -2.108,-30.51 C28.2@-2.21,-30.611 ; v2(-1.549,-30.836) -1.986,-30.836 C28.2@-2.21,-30.611 ; v1(-1.2,-11.629) U2.M12@-0.8,-11.229 ; v1(-1.2,-6.829) U2.M7@-0.8,-7.229 ; U1.E9@-0.899,-25.821 v1(-1.299,-26.221) -1.795,-26.221 -2.108,-25.908 ; v1(-0.4,-10.029) U2.L10@0,-9.629 ; v1(-0.4,-7.629) U2.L8@0,-8.029 ; v1(0.4,-10.829) U2.K11@0.8,-10.429 ; v1(0.4,-8.429) U2.K9@0.8,-8.829 ; v2(0.7,-19.7) 0.701,-19.701 0.701,-20.447 0.694,-20.454 0.694,-20.791 0.701,-20.797 U1.L7@0.701,-21.022 ; U2.J10@1.6,-9.629 v1(2,-10.029) ; U2.J8@1.6,-8.029 v1(2,-7.629) ; U2.H11@2.4,-10.429 v1(2.8,-10.829) ; U2.H9@2.4,-8.829 v1(2.8,-8.429) ; U2.G7@3.2,-7.229 v1(3.6,-6.829) ; U1.C3@3.9,-27.421 v1(4.3,-27.821) 6.342,-27.821 v2(6.477,-27.686) ; U1.H1@5.5,-23.422 v2(6.782,-23.422) C16.2@7.008,-23.422
  Top Layer w0.152: U1.L5@2.301,-21.022 v2(2.301,-19.901) ; U3.4@9.248,-39.344 9.248,-39.753 9.881,-40.386 9.881,-40.894 10.287,-41.3 11.156,-41.3 R11.2@11.643,-40.814 12.344,-40.112 12.344,-37.557 C54.2@11.3,-36.513
  Top Layer w0.305: R30.2@9.008,-32.8 10.194,-32.8 v2(11.516,-34.122)
  Top Layer w0.508: C54.2@11.516,-36.297 L17.2@11.516,-34.845 v2(11.516,-34.122)
  Signal Layer 1 w0.102: v2(6.782,-23.422) 6.785,-23.419 v2(9.728,-23.419)
  Signal Layer 1 w0.203: v2(-4.597,-21.971) -4.597,-23.805 -3.378,-25.024 v2(-3.378,-25.07) ; v2(0.7,-19.7) 2.1,-19.7 v2(2.301,-19.901) 2.846,-19.355 v2(10.363,-19.355)
  Signal Layer 1 w0.508: v2(-3.073,-26.314) -2.87,-26.518 -2.87,-29.667 -3.912,-30.709 -3.912,-34.061 -2.036,-35.937 4.881,-35.937 8.026,-32.791 v2(9.449,-32.791)
  Bottom Layer w0.102: v2@-4.699,-21.971 v2(-4.597,-21.971) v2(-3.683,-21.971) ; C25.2@-3.625,-22.429 C18.2@-3.625,-21.529 ; v2(9.728,-23.419) 10.312,-23.419 10.338,-23.444 10.973,-23.444
  Bottom Layer w0.203: R31.2@6.008,-30.5 6.274,-30.234 6.274,-27.889 v2(6.477,-27.686) ; v2(10.363,-19.355) 10.922,-19.355
  Bottom Layer w0.305: R31.2@6.008,-30.5 7.157,-30.5 v2(9.449,-32.791)
  Bottom Layer w0.508: C91.1@2.14,-9.491 2.392,-9.238 2.441,-9.238 2.459,-9.22 6.764,-9.22 6.96,-9.023 6.963,-9.021 7.464,-9.021 7.819,-9.376 7.819,-9.546 10.973,-12.7 10.973,-23.444 10.973,-33.579 v2(11.516,-34.122)
1.8: C27.2 J4.3 J5.3 U5.3 | length 23.2
  Bottom Layer w0.203: J4.3@-4.233,-1.236 -0.542,-1.236 -0.152,-1.626 4.623,-1.626 5.512,-0.737 7.391,-0.737 7.976,-1.321 9.169,-1.321 10.052,-2.204 C27.2@10.052,-6.114 C27.2@10.052,-6.122 ; J5.3@9.391,-8.35 9.391,-6.357 9.626,-6.122 C27.2@10.052,-6.122 ; U5.3@11.154,-6.122 C27.2@10.052,-6.122
3.3D: C7.2 C12.2 C22.2 C23.2 C24.2 C26.2 C35.2 C36.2 C37.2 C56.2 C68.2 C71.1 C76.1 C79.1 C87.1 C88.1 C89.1 C93.1 C94.1 C95.1 C96.1 J1.1 J2.1 J4.1 J5.1 L18.2 P3.4 P4.4 R1.2 R4.2 R5.2 R13.2 R18.2 R20.2 R21.2 R22.2 R23.1 R26.1 R27.1 R28.1 R29.1 R32.1 R41.2 U1.B1 U1.C11 U1.E3 U1.F1 U1.H11 U1.L9 U2.B1 U2.B17 U2.E2 U2.E5 U2.E9 U2.E14 U2.E17 U2.G4 U2.G10 U2.G15 U2.J2 U2.J5 U2.J12 U2.J14 U2.J17 U2.K7 U2.M4 U2.M9 U2.M15 U2.P5 U2.P10 U2.P14 U2.R2 U2.R17 U4.8 U5.1 U5.6 U8.3 U8.7 U8.8 U10.8 X1.4 | length 252.7
  Top Layer w0.102: P3.4@-13.25,-38.425 -11.882,-38.425 -7.595,-34.138 R23.1@-4.06,-34.138 -4.06,-33.447 -2.159,-31.547 -1.118,-31.547 -0.787,-31.877 -0.787,-32.868 ; C12.2@-9.529,-27.305 v2(-9.119,-27.305) U10.8@-8.69,-27.305 ; U10.8@-8.509,-27.124 -6.639,-25.254 R4.2@-6,-25.254 R18.2@-5,-25.254 v2(-3.759,-26.495) ; X1.4@-7.8,-3.208 R32.1@-7.8,-1.2 ; U8.3@-6.477,-23.726 v2(-6.477,-23.165) -6.248,-22.936 -4.216,-22.936 v2(-3.607,-23.546) -3.483,-23.422 U1.H11@-2.498,-23.422 ; v2(-3.567,-15.596) U2.R17@-3.2,-15.229 ; v2(-3.545,-27.421) U1.C11@-2.498,-27.421 ; v1(-2.8,-13.229) U2.P14@-2.4,-12.829 ; v1(-2.8,-10.029) U2.P10@-2.4,-9.629 ; v1(-2.8,-5.229) U2.P5@-2.4,-5.629 ; -2.784,-4.429 v1(-1.2,-4.429) U2.M4@-0.8,-4.829 ; v1(-1.2,-14.029) U2.M15@-0.8,-13.629 ; v1(-1.2,-8.429) U2.M9@-0.8,-8.829 ; U4.8@-1.1,-33.8 v2(-1.1,-33.18) -0.787,-32.868 ; v2(-0.9,-19.8) -0.899,-19.801 U1.L9@-0.899,-21.022 ; v1(0.4,-6.829) U2.K7@0.8,-7.229 ; v2(0.838,-31.064) 0.838,-31.242 -0.787,-32.868 ; v2(1.216,-2.845) U2.J2@1.6,-3.229 1.981,-2.848 C94.1@1.981,-1.024 ; U2.J17@1.6,-15.229 2.007,-15.636 2.007,-17.069 3.404,-18.466 R28.1@3.404,-19.105 ; U2.J14@1.6,-12.829 v1(2,-13.229) ; U2.J12@1.6,-11.229 v1(2,-11.629) ; U2.J5@1.6,-5.629 v1(2,-5.229) ; U2.G15@3.2,-13.629 v1(3.6,-14.029) ; U2.G10@3.2,-9.629 v1(3.6,-10.029) ; U2.G4@3.2,-4.829 v1(3.6,-4.429) ; R21.2@3.875,-35.6 R20.2@3.875,-36.5 R22.2@3.875,-37.5 3.938,-37.563 4.561,-37.563 4.647,-37.649 5.105,-37.649 ; U1.E3@3.9,-25.821 v1(4.3,-26.221) ; U2.E14@4.8,-12.829 v1(5.2,-13.229) ; U2.E9@4.8,-8.829 v1(5.2,-8.429) ; U2.E5@4.8,-5.629 v1(5.2,-5.229) ; U2.E2@4.8,-3.229 v2(5.184,-2.845) ; U1.B1@5.5,-28.221 6.667,-28.221 v2(6.787,-28.341) C37.2@7.1,-28.654 ; U1.F1@5.5,-25.021 5.777,-25.298 v2(6.274,-25.298) ; R1.2@5.953,-40.789 5.029,-41.713 5.029,-43.104 6.825,-44.9 R26.1@11.825,-44.9 ; R1.2@5.963,-40.779 C7.2@5.963,-39.836 5.105,-38.979 5.105,-37.649 ; C56.2@6.207,-36.547 5.105,-37.649 ; v2(6.833,-21.234) 7.616,-22.017 R27.1@7.616,-22.352 ; U2.B17@7.2,-15.229 7.668,-15.697 8.305,-15.697 v2@9.246,-16.637 ; v2(9.22,-16.637) v2@9.246,-16.637 ; v2@9.322,-16.713 v2@9.246,-16.637
  Top Layer w0.127: v2(6.579,-1.321) 7.2,-1.942 U2.B1@7.2,-2.429
  Top Layer w0.152: U2.R2@-3.2,-3.229 -2.8,-3.629 v1(-2.8,-5.229) ; U2.J17@1.6,-15.229 1.194,-14.823 1.194,-13.235 U2.J14@1.6,-12.829 ; U2.E17@4.8,-15.229 v2(5.004,-15.433) ; v2(13.005,-37.16) 14.035,-37.16 P4.4@14.05,-37.175
  Top Layer w0.508: v2(-9.017,-17.726) U8.7@-7.747,-17.726 ; v2(5.236,-36.547) C56.2@6.207,-36.547 ; C56.2@6.055,-36.394 L18.2@6.055,-34.845 ; v2(6.579,-1.321) 6.799,-1.1 C88.1@7.3,-1.1
  Signal Layer 1 w0.102: v2(-3.759,-26.495) -3.759,-27.207 v2(-3.545,-27.421) ; v1(4.3,-26.221) 4.749,-26.67 5.451,-26.67 6.274,-25.847 v2(6.274,-25.298) ; v2(6.833,-21.234) 10.973,-21.234
  Signal Layer 1 w0.152: v2(-3.607,-23.546) -3.607,-24.035 -3.284,-24.359 -2.692,-24.359 -2.489,-24.155 -2.489,-21.389 v2(-0.9,-19.8) ; v2(5.236,-36.547) 12.391,-36.547 v2(13.005,-37.16) ; v2(6.787,-28.341) 6.919,-28.473 11.024,-28.473
  Signal Layer 1 w0.254: v2(6.274,-25.298) 6.756,-25.781 11.024,-25.781
  Signal Layer 1 w0.508: v2(-9.119,-27.305) -9.119,-5.182 -7.595,-3.658 v2(-7.595,-1.88) ; v2(-7.671,-34.29) -7.671,-35.027 -6.151,-36.547 v2(5.236,-36.547) 6.731,-35.052 9.017,-35.052 11.024,-33.045 11.024,-28.473 11.024,-25.781 11.024,-5.766 8.153,-2.896 ; v2(6.579,-1.321) 8.153,-2.896 ; v2(8.763,-2.896) 8.153,-2.896 ; v2(9.22,-16.637) 10.897,-16.637
  Bottom Layer w0.102: v2(-9.144,-22.784) -8.763,-23.165 v2(-6.477,-23.165) ; v1(3.6,-4.429) 4.023,-4.006 4.556,-4.006 4.777,-3.785 4.777,-3.252 v2(5.184,-2.845) 6.579,-1.45 v2(6.579,-1.321)
  Bottom Layer w0.127: 2.4,-4.829 2.952,-4.829 3.352,-4.429
  Bottom Layer w0.152: v2(-9.017,-17.726) -8.191,-16.9 C68.2@-7.208,-16.9 -7.518,-16.59 -7.518,-13.792 R41.2@-7.849,-13.462 ; C71.1@-6.502,-9.715 -6.414,-9.626 -4.669,-9.626 -4.618,-9.677 -4.567,-9.626 -4.233,-9.626 -4.176,-9.683 -4.119,-9.626 -3.203,-9.626 v1(-2.8,-10.029) -2.288,-10.541 J2.1@-1.956,-10.541 -1.956,-9.185 v1(-1.2,-8.429) ; v2(1.216,-2.845) 1.597,-3.226 1.597,-4.243 1.622,-4.268 1.622,-4.622 1.597,-4.647 1.597,-4.826 v1(2,-5.229) 2.4,-4.829
  Bottom Layer w0.203: 9.296,-10.033 9.783,-10.033 J5.1@10.416,-9.4 11.11,-9.4 C26.2@13.38,-7.13 13.372,-7.122 U5.6@12.379,-7.122 U5.1@11.154,-7.122
  Bottom Layer w0.508: v2(-9.119,-27.305) -7.671,-28.753 v2(-7.671,-34.29) ; v2(-7.595,-1.88) -6.833,-2.642 -5.664,-2.642 J4.1@-5.283,-2.261
CC1: P5.5 U4.2 U6.4 | length 17.3
  Top Layer w0.102: v2(-2.972,-37.998) -2.972,-38.049 -2.82,-38.201 U6.4@-2.82,-39.24 U6.4@-2.82,-40.04 P5.5@-2.82,-41.523 ; U4.2@1.3,-33.8 1.3,-33.549 1.35,-33.499 1.411,-33.499 1.61,-33.299 v2(2.057,-33.299)
  Bottom Layer w0.102: v2(-2.972,-37.998) -3.505,-37.998 -3.759,-38.252 -3.759,-39.04 -3.353,-39.446 -1.651,-39.446 2.87,-34.925 2.87,-33.604 2.565,-33.299 v2(2.057,-33.299)
CC2: P5.B5 U4.1 U6.5 | length 23.6
  Top Layer w0.102: v2(-3.32,-38.514) U6.5@-3.32,-39.24 U6.5@-3.32,-40.04 -3.32,-40.709 v2(-3.251,-40.64) ; U4.1@1.7,-33.8 v2(2.42,-33.8)
  Signal Layer 1 w0.102: v2(-3.251,-40.64) -3.81,-40.64 -5.766,-42.596 -5.766,-42.85 -6.553,-43.637 -6.553,-44.171 -5.944,-44.78 -2.367,-44.78 P5.B5@-1.19,-43.603
  Bottom Layer w0.102: v2(-3.32,-38.514) -3.32,-38.895 -2.972,-39.243 -1.778,-39.243 2.42,-35.045 v2(2.42,-33.8)
CCLK: U1.D4 U2.R15 U8.6 | length 23.8
  Top Layer w0.102: v2@-6.477,-18.44 U8.6@-6.477,-17.726 ; v1(-3.6,-14.029) U2.R15@-3.2,-13.629 ; U1.D4@3.1,-26.621 v1(3.5,-27.021)
  Signal Layer 1 w0.102: v2(-6.477,-18.542) -6.426,-18.542 -4.191,-20.777 -4.191,-23.774 -3.346,-24.619 -3.214,-24.619 -3.093,-24.74 1.092,-24.74 1.93,-25.578 1.93,-26.238 2.311,-26.619 3.099,-26.619 v1(3.5,-27.021)
  Bottom Layer w0.102: v2(-6.477,-18.542) -6.147,-18.542 -5.131,-17.526 -5.131,-14.783 -4.775,-14.427 -3.998,-14.427 v1(-3.6,-14.029)
CLOCK_REF: C113.2 R34.1 U2.V9 | length 3.8
  Top Layer w0.102: v2(-7.62,-8.839) -6.675,-8.839 -6.665,-8.829 U2.V9@-5.6,-8.829
  Bottom Layer w0.102: C113.2@-7.95,-7.645 -7.95,-8.357 -7.628,-8.679 R34.1@-7.061,-8.679
CTL0: U1.K8 U2.L18 | length 6
  Top Layer w0.102: U1.K8@-0.099,-21.822 0.207,-21.516 0.207,-18.724 -0.021,-18.495 -0.021,-17.058 -0.021,-16.724 0,-16.703 U2.L18@0,-16.029
CTL1: U1.K7 U2.K17 | length 7.2
  Top Layer w0.102: U1.K7@0.701,-21.822 1.1,-21.423 1.1,-20.719 1.098,-20.717 1.098,-20.384 1.1,-20.383 1.1,-19.869 1.102,-19.867 1.102,-19.533 1.1,-19.531 1.1,-19.269 1.098,-19.267 1.098,-18.933 1.1,-18.931 1.1,-18.448 0.381,-17.729 0.381,-15.648 U2.K17@0.8,-15.229
CTL2: U1.J7 U2.K15 | length 9.9
  Top Layer w0.102: v1(0.301,-22.222) U1.J7@0.701,-22.622 ; v1(0.4,-14.029) U2.K15@0.8,-13.629
  Bottom Layer w0.102: v1(0.301,-22.222) -0.229,-21.692 -0.229,-18.461 -0.156,-18.389 -0.156,-17.887 -0.156,-17.783 -0.156,-17.58 -0.229,-17.508 -0.229,-16.696 -0.197,-16.664 -0.197,-16.275 0,-16.078 0,-14.429 v1(0.4,-14.029)
CTL3: U1.H7 U2.K16 | length 9.8
  Top Layer w0.102: v1(0.301,-23.022) U1.H7@0.701,-23.422 ; v1(0.4,-14.829) U2.K16@0.8,-14.429
  Bottom Layer w0.102: v1(0.301,-23.022) 0.686,-22.637 0.686,-22.412 0.707,-22.39 0.707,-22.054 0.142,-21.488 0.142,-17.323 0.4,-17.065 v1(0.4,-14.829)
CTL4: U1.G7 U2.N15 | length 14.1
  Top Layer w0.102: v1(-2,-14.029) U2.N15@-1.6,-13.629 ; v1(0.301,-23.822) U1.G7@0.701,-24.222
  Bottom Layer w0.102: v1(-2,-14.029) -2.388,-14.417 -2.388,-17.043 -2.398,-17.033 -2.398,-17.673 -2.565,-17.841 -2.565,-18.371 -2.442,-18.494 -2.442,-18.996 -2.565,-19.119 -2.565,-22.854 -2.54,-22.879 -2.54,-22.927 -1.676,-23.791 -1.676,-23.978 -1.455,-24.199 -1.372,-24.282 -0.16,-24.282 v1(0.301,-23.822)
CTL5: U1.G6 U2.N14 | length 16.7
  Top Layer w0.102: v1(-2,-13.229) U2.N14@-1.6,-12.829 ; v1(1.101,-23.822) U1.G6@1.501,-24.222
  Signal Layer 1 w0.102: v2(-3.15,-18.161) -2.885,-18.161 -2.398,-17.673 -2.398,-13.627 v1(-2,-13.229)
  Bottom Layer w0.102: v2@-3.15,-18.237 -3.044,-18.343 -2.881,-18.343 -2.646,-18.579 -2.646,-18.912 -2.769,-19.035 -2.769,-23.016 -2.738,-23.016 -1.879,-23.875 -1.879,-24.062 -1.539,-24.402 -1.456,-24.486 0.437,-24.486 v1(1.101,-23.822)
CTL6: U1.K6 U2.K18 | length 6.4
  Top Layer w0.102: U2.K18@0.8,-16.029 0.8,-17.107 0.8,-17.767 1.8,-18.767 1.8,-20.281 1.903,-20.384 1.903,-20.717 1.8,-20.821 1.8,-21.523 U1.K6@1.501,-21.822
CTL7: U1.H8 U2.K14 | length 11.3
  Top Layer w0.102: v1(-0.499,-23.022) U1.H8@-0.099,-23.422 ; v1(0.4,-13.229) U2.K14@0.8,-12.829
  Signal Layer 1 w0.102: v1(-0.499,-23.022) -0.102,-22.625 -0.102,-15.596 0,-15.494 0,-13.629 v1(0.4,-13.229)
CTL8: U1.G5 U2.G14 | length 16.3
  Top Layer w0.102: U1.G5@2.301,-24.222 v1(2.701,-23.822) ; U2.G14@3.2,-12.829 v1(3.6,-13.229)
  Bottom Layer w0.102: v1(2.701,-23.822) 3.288,-24.409 4.674,-24.409 6.299,-22.784 6.299,-18.999 4.197,-16.897 4.197,-15.77 4.195,-15.768 4.195,-15.158 3.988,-14.95 3.988,-13.617 v1(3.6,-13.229)
CTL9: U1.H6 U2.L14 | length 13.4
  Top Layer w0.102: v1(-0.4,-13.229) U2.L14@0,-12.829 ; v1(1.101,-23.022) U1.H6@1.501,-23.422
  Bottom Layer w0.102: v1(-0.4,-13.229) 0.002,-12.827 0.66,-12.827 0.991,-13.157 0.991,-14.692 1.015,-14.717 1.015,-16.209 1.132,-16.325 1.161,-16.325 1.161,-18.128 1.549,-18.517 1.549,-20.041 1.657,-20.148 1.667,-20.148 1.903,-20.384 1.903,-20.717 1.539,-21.082 1.539,-22.584 v1(1.101,-23.022)
CTL10: U1.K5 U2.J18 | length 7
  Top Layer w0.102: U2.J18@1.6,-16.029 1.6,-17.577 1.829,-17.805 2.438,-17.805 2.921,-18.288 2.921,-18.771 2.718,-18.974 2.718,-21.405 U1.K5@2.301,-21.822
CTL11: U1.J5 U2.J16 | length 8.9
  Top Layer w0.102: U2.J16@1.6,-14.429 v1(2,-14.829) ; U1.J5@2.301,-22.622 2.667,-22.255 v1(2.667,-22.225)
  Bottom Layer w0.102: v1(2,-14.829) 2,-16.618 1.981,-16.637 1.981,-17.465 2.815,-18.299 2.815,-22.107 2.697,-22.225 v1(2.667,-22.225)
CTL12: U1.H5 U2.H15 | length 10.8
  Top Layer w0.102: U1.H5@2.301,-23.422 v1(2.701,-23.022) ; U2.H15@2.4,-13.629 v1(2.8,-14.029)
  Bottom Layer w0.102: v1(2.701,-23.022) 3.099,-22.624 3.099,-22.419 3.073,-22.393 3.073,-22.057 3.099,-22.031 3.099,-20.79 3.052,-20.743 3.052,-20.41 3.099,-20.363 3.099,-18.085 2.388,-17.374 2.388,-14.564 2.8,-14.152 v1(2.8,-14.029)
DATA: U1.D5 U2.R13 U8.2 | length 27.1
  Top Layer w0.102: U8.2@-7.747,-23.726 -7.058,-24.416 -3.339,-24.416 -3.3,-24.455 -3.091,-24.455 -3.005,-24.541 1.63,-24.541 1.93,-24.841 1.93,-26.251 U1.D5@2.301,-26.621 v1(2.701,-27.021) ; U8.2@-7.645,-23.625 v2(-7.645,-22.428) ; v1(-3.6,-12.429) U2.R13@-3.2,-12.029
  Bottom Layer w0.102: v2(-7.645,-22.428) -8.099,-21.975 -8.099,-19.137 -6.563,-17.602 -6.121,-17.602 -5.563,-17.043 -5.563,-13.741 -4.648,-12.827 -3.998,-12.827 v1(-3.6,-12.429)
DONE: R43.1 U1.D1 U2.V17 | length 91.2
  Top Layer w0.102: v2(-13.767,-0.864) R43.1@-13.124,-0.864 ; v2(-6.528,-15.875) -6.274,-15.875 -5.799,-15.4 -5.771,-15.4 U2.V17@-5.6,-15.229 ; U1.D1@5.5,-26.621 6.086,-26.035 7.434,-26.035 9.009,-24.46 9.609,-24.46 10.566,-25.417 10.566,-26.068 11.532,-27.034 11.532,-28.972 12.649,-30.09 v2(12.649,-30.836)
  Signal Layer 1 w0.102: v2(-6.579,-6.248) -7.061,-6.731 -7.061,-8.323 -6.902,-8.482 -6.902,-15.5 v2(-6.528,-15.875)
  Bottom Layer w0.102: v2(-6.579,-6.248) -11.963,-0.864 v2(-13.767,-0.864) -13.183,-0.279 9.449,-0.279 14.605,-5.436 14.605,-24.892 12.243,-27.254 12.243,-29.591 12.649,-29.997 v2(12.649,-30.836)
DQ0: U1.F10 U2.U17 | length 17.6
  Top Layer w0.102: U2.U17@-4.8,-15.229 -5.156,-15.585 -5.156,-16.383 -5.69,-16.916 -5.69,-19.837 -8.407,-22.555 -8.407,-24.308 -8.096,-24.619 -7.142,-24.619 -3.423,-24.619 -3.384,-24.658 -3.298,-24.658 -3.175,-24.658 -3.089,-24.744 -1.976,-24.744 U1.F10@-1.699,-25.021
DQ1: U1.F9 U2.T17 | length 14.4
  Top Layer w0.102: v2(-4.216,-19.964) -4.369,-19.812 -4.369,-15.598 U2.T17@-4,-15.229 ; v1(-1.299,-25.421) U1.F9@-0.899,-25.021
  Bottom Layer w0.102: v2(-4.216,-19.964) -5.639,-21.387 -5.639,-22.86 -4.369,-24.13 -3.337,-24.13 -3.216,-24.251 -2.927,-24.251 -1.757,-25.421 v1(-1.299,-25.421)
DQ2: U1.F7 U2.P15 | length 15.9
  Top Layer w0.102: v1(-2.8,-14.029) U2.P15@-2.4,-13.629 ; v1(0.301,-25.421) U1.F7@0.701,-25.021
  Bottom Layer w0.102: v1(-2.8,-14.029) -3.2,-14.429 -3.2,-15.367 -3.048,-15.519 -3.048,-16.866 -3.658,-17.475 -3.658,-18.151 -3.958,-18.452 -3.958,-19.181 -2.972,-20.168 -2.972,-23.22 -2.822,-23.22 -2.082,-23.959 -2.082,-24.146 -1.623,-24.605 -1.54,-24.689 -0.025,-24.689 0.301,-25.015 v1(0.301,-25.421)
DQ3: U1.G10 U2.P18 | length 10.6
  Top Layer w0.102: v2(-3.556,-18.618) -2.921,-18.618 -2.4,-18.097 -2.4,-17.676 -2.398,-17.673 -2.398,-17.34 -2.4,-17.338 U2.P18@-2.4,-16.029 ; v2(-3.049,-23.849) -3,-23.8 -2.12,-23.8 U1.G10@-1.699,-24.222
  Signal Layer 1 w0.102: v2(-3.556,-18.618) -3.734,-18.796 -3.734,-20.091 -3.049,-20.776 v2(-3.049,-23.849) v2@-3.075,-23.849
DQ4: U1.G9 U2.N16 | length 10.8
  Top Layer w0.102: v1(-2,-14.829) U2.N16@-1.6,-14.429 ; v1(-1.299,-23.822) U1.G9@-0.899,-24.222
  Bottom Layer w0.102: v1(-2,-14.829) -2,-17.189 -2.194,-17.384 -2.194,-17.757 -2.337,-17.9 -2.337,-18.313 -2.239,-18.41 -2.239,-19.08 -2.337,-19.178 -2.337,-22.843 -1.557,-23.622 -1.498,-23.622 v1(-1.299,-23.822)
DQ5: U1.F8 U2.T18 | length 12
  Top Layer w0.102: v2@-4,-17.183 v2@-4,-17.12 ; U2.T18@-4,-16.029 v2@-4,-17.12 ; v2(-3.962,-17.157) v2@-4,-17.12 ; v1(-0.499,-25.421) U1.F8@-0.099,-25.021
  Bottom Layer w0.102: v2@-3.861,-17.259 -3.861,-18.067 -4.162,-18.367 -4.162,-19.265 -3.175,-20.252 -3.175,-23.341 -3.093,-23.423 -2.906,-23.423 -2.286,-24.043 -2.286,-24.23 -1.708,-24.809 -1.624,-24.892 -1.028,-24.892 v1(-0.499,-25.421)
DQ6: U1.H10 U2.U18 | length 9.5
  Top Layer w0.102: U2.U18@-4.8,-16.029 -4.619,-16.21 -4.619,-20.349 -4.191,-20.777 -4.191,-22.309 -3.5,-23 -2.12,-23 U1.H10@-1.699,-23.422
DQ7: U1.H9 U2.M16 | length 9.9
  Top Layer w0.102: v1(-1.299,-23.022) U1.H9@-0.899,-23.422 ; v1(-1.2,-14.829) U2.M16@-0.8,-14.429
  Bottom Layer w0.102: v1(-1.299,-23.022) -1.905,-22.415 -1.905,-18.009 -1.651,-17.755 -1.651,-15.28 v1(-1.2,-14.829)
DQ8: U1.J10 U2.P17 | length 9.3
  Top Layer w0.102: U2.P17@-2.4,-15.229 -2.794,-15.623 -2.794,-16.932 -3.708,-17.846 -3.708,-18.216 -3.723,-18.216 -3.958,-18.452 -3.958,-18.785 -3.723,-19.021 -3.708,-19.021 -3.708,-21.092 -2.6,-22.2 -2.12,-22.2 U1.J10@-1.699,-22.622
DQ9: U1.J9 U2.L15 | length 10
  Top Layer w0.102: v1(-1.321,-22.225) -1.296,-22.225 U1.J9@-0.899,-22.622 ; v1(-0.4,-14.029) U2.L15@0,-13.629
  Bottom Layer w0.102: v1(-1.321,-22.225) -1.321,-22.2 -1.676,-21.844 -1.676,-18.11 -0.813,-17.247 -0.813,-14.442 v1(-0.4,-14.029)
DQ10: U1.K11 U2.N17 | length 7
  Top Layer w0.102: U1.K11@-2.498,-21.822 -2.1,-21.424 -2.1,-19.5 -2.007,-19.407 -2.007,-15.636 U2.N17@-1.6,-15.229
DQ11: U1.L10 U2.N18 | length 5
  Top Layer w0.102: U1.L10@-1.699,-21.022 -1.699,-16.128 U2.N18@-1.6,-16.029
DQ12: U1.K10 U2.M18 | length 6.2
  Top Layer w0.102: U1.K10@-1.699,-21.822 -1.397,-21.52 -1.397,-16.626 U2.M18@-0.8,-16.029
DQ13: U1.K9 U2.L17 | length 7.7
  Top Layer w0.102: U1.K9@-0.899,-21.822 -0.457,-21.38 -0.457,-18.644 -0.737,-18.364 -0.889,-18.364 -1.194,-18.059 -1.194,-17.297 -0.432,-16.535 -0.432,-15.661 U2.L17@0,-15.229
DQ14: U1.J8 U2.L16 | length 8.6
  Top Layer w0.102: v1(-0.499,-22.222) U1.J8@-0.099,-22.622 ; v1(-0.4,-14.829) U2.L16@0,-14.429
  Bottom Layer w0.102: v1(-0.499,-22.222) -0.443,-22.166 -0.443,-18.388 -0.36,-18.305 -0.36,-17.971 -0.36,-17.867 -0.36,-17.664 -0.443,-17.581 -0.443,-16.585 -0.4,-16.542 v1(-0.4,-14.829)
DQ15: U1.G8 U2.M14 | length 13
  Top Layer w0.102: v1(-1.2,-13.229) U2.M14@-0.8,-12.829 ; v1(-0.499,-23.822) U1.G8@-0.099,-24.222
  Signal Layer 1 w0.102: v1(-1.2,-13.229) -1.626,-13.655 -1.626,-13.87 -1.623,-13.873 -1.623,-14.185 -1.626,-14.188 -1.626,-14.67 -1.623,-14.673 -1.623,-14.985 -1.626,-14.988 -1.626,-18.745 -1.067,-19.304 -0.635,-19.304 -0.406,-19.533 -0.406,-20.015 -0.914,-20.523 -0.914,-23.406 v1(-0.499,-23.822)
DQ16: U1.K2 U2.H17 | length 7.5
  Top Layer w0.102: U2.H17@2.4,-15.229 2.819,-15.648 2.819,-17.32 3.785,-18.285 3.785,-19.025 4.216,-19.456 4.216,-21.338 U1.K2@4.7,-21.822
DQ17: U1.J4 U2.H16 | length 9.1
  Top Layer w0.102: U2.H16@2.4,-14.429 v1(2.8,-14.829) ; U1.J4@3.1,-22.622 3.48,-22.243 v1(3.48,-22.225)
  Bottom Layer w0.102: v1(2.8,-14.829) 2.8,-17.034 3.5,-17.734 3.5,-20.041 3.691,-20.231 3.691,-20.243 3.857,-20.41 3.857,-20.743 3.48,-21.12 v1(3.48,-22.225)
DQ18: U1.K1 U2.F17 | length 7.6
  Top Layer w0.102: U2.F17@4,-15.229 4.394,-15.623 4.394,-17.018 5.944,-18.567 5.944,-21.378 U1.K1@5.5,-21.822
DQ19: U1.J2 U2.F18 | length 7.2
  Top Layer w0.102: U2.F18@4,-16.029 4,-17.082 5.08,-18.162 5.08,-22.242 U1.J2@4.7,-22.622
DQ20: U1.J3 U2.G18 | length 7.3
  Top Layer w0.102: U2.G18@3.2,-16.029 3.2,-17.399 v2(4.343,-18.542) ; U1.J3@3.9,-22.622 v1(4.3,-22.222)
  Bottom Layer w0.102: v1(4.3,-22.222) 4.246,-22.167 4.246,-20.929 4.263,-20.911 4.263,-20.241 4.246,-20.224 4.246,-18.64 v2(4.343,-18.542)
DQ21: U1.J1 U2.E18 | length 7.4
  Top Layer w0.102: U2.E18@4.8,-16.029 4.8,-17.017 6.172,-18.39 6.172,-21.95 U1.J1@5.5,-22.622
DQ22: U1.H2 U2.D17 | length 10
  Top Layer w0.102: U1.H2@4.7,-23.422 5.109,-23.012 5.817,-23.012 6.375,-22.454 6.375,-18.305 5.182,-17.112 5.182,-15.824 5.406,-15.599 5.406,-15.423 U2.D17@5.6,-15.229
DQ23: U1.H3 U2.H14 | length 11.7
  Top Layer w0.102: U2.H14@2.4,-12.829 v1(2.8,-13.229) ; U1.H3@3.9,-23.422 v1(4.3,-23.022)
  Bottom Layer w0.102: v1(2.8,-13.229) 3.2,-13.629 3.2,-17.069 3.894,-17.762 3.894,-20.159 4.06,-20.325 4.06,-20.827 3.894,-20.993 3.894,-22.054 ; 3.912,-22.036 3.894,-22.054 ; v1(4.3,-23.022) 3.912,-22.633 3.912,-22.408 3.894,-22.39 3.894,-22.054
DQ24: U1.F4 U2.F15 | length 16.9
  Top Layer w0.102: U1.F4@3.1,-25.021 v1(3.5,-25.421) ; U2.F15@4,-13.629 v1(4.4,-14.029)
  Bottom Layer w0.102: v1(3.5,-25.421) 3.903,-25.019 4.994,-25.019 5.909,-24.105 7.018,-24.105 7.518,-23.605 7.518,-19.644 4.775,-16.9 4.775,-15.773 4.601,-15.599 4.601,-15.266 4.775,-15.092 4.775,-14.988 4.777,-14.985 4.777,-14.673 4.775,-14.67 4.775,-14.515 4.4,-14.14 v1(4.4,-14.029)
DQ25: U1.G2 U2.C18 | length 12.1
  Top Layer w0.102: U1.G2@4.7,-24.222 5.071,-23.851 7.874,-23.851 8.153,-23.571 8.153,-18.432 7.222,-17.501 6.983,-17.501 6.4,-16.917 U2.C18@6.4,-16.029
DQ26: U1.G3 U2.G16 | length 11
  Top Layer w0.102: U2.G16@3.2,-14.429 v1(3.6,-14.829) ; U1.G3@3.9,-24.222 v1(4.3,-23.822)
  Bottom Layer w0.102: v1@3.589,-14.84 3.988,-15.238 3.988,-17.018 5.055,-18.085 5.055,-23.067 v1(4.3,-23.822)
DQ27: U1.F3 U2.E16 | length 15.3
  Top Layer w0.102: U1.F3@3.9,-25.021 v1(4.3,-25.421) ; U2.E16@4.8,-14.429 v1(5.2,-14.829)
  Bottom Layer w0.102: v1(4.3,-25.421) 4.879,-25.421 5.993,-24.308 7.103,-24.308 7.722,-23.689 7.722,-19.507 5.207,-16.993 5.207,-16.942 5.2,-16.935 5.2,-15.806 5.406,-15.599 5.406,-15.266 5.2,-15.06 v1(5.2,-14.829)
DQ28: U1.F5 U2.F16 | length 16.4
  Top Layer w0.102: U1.F5@2.301,-25.021 v1(2.701,-25.421) ; U2.F16@4,-14.429 v1(4.4,-14.829)
  Bottom Layer w0.102: v1(2.701,-25.421) 3.306,-24.816 4.91,-24.816 5.825,-23.901 6.934,-23.901 7.315,-23.52 7.315,-19.728 4.4,-16.813 4.4,-15.685 4.398,-15.684 4.398,-15.182 4.4,-15.18 v1(4.4,-14.829)
DQ29: U1.E1 U2.F14 | length 17.8
  Top Layer w0.102: U2.F14@4,-12.829 v1(4.4,-13.229) ; U1.E1@5.5,-25.821 7.361,-25.821 8.611,-24.571 8.611,-18.313 7.391,-17.094 v2(7.188,-17.094)
  Bottom Layer w0.102: v1(4.4,-13.229) 4.811,-13.64 5.473,-13.64 5.613,-13.78 5.613,-15.316 7.188,-16.891 v2(7.188,-17.094)
DQ30: U1.E5 U2.C17 | length 16.6
  Top Layer w0.102: U1.E5@2.301,-25.821 v1(2.701,-26.221) ; U2.C17@6.4,-15.229 5.994,-15.635 5.994,-16.993 6.706,-17.704 7.137,-17.704 7.442,-18.009 v2(7.442,-18.593)
  Bottom Layer w0.102: v1(2.701,-26.221) 3.09,-25.832 4.801,-25.832 6.121,-24.511 7.187,-24.511 7.925,-23.773 7.925,-19.075 v2(7.442,-18.593)